# Altium PCB Main.PcbDoc (part 1 of 2)
Units mil, origin at the board's own origin, x right, y up, seen from the top; angles counter-clockwise.
Board outline 5000 x 4200 mil, 4 copper layers (Top Layer, Gnd 1, Power, Gnd 2), stack 62.4 mil thick; 161 components, 127 nets, 645 pads, 533 vias.
Unrouted connection lines stored in the file: 1.
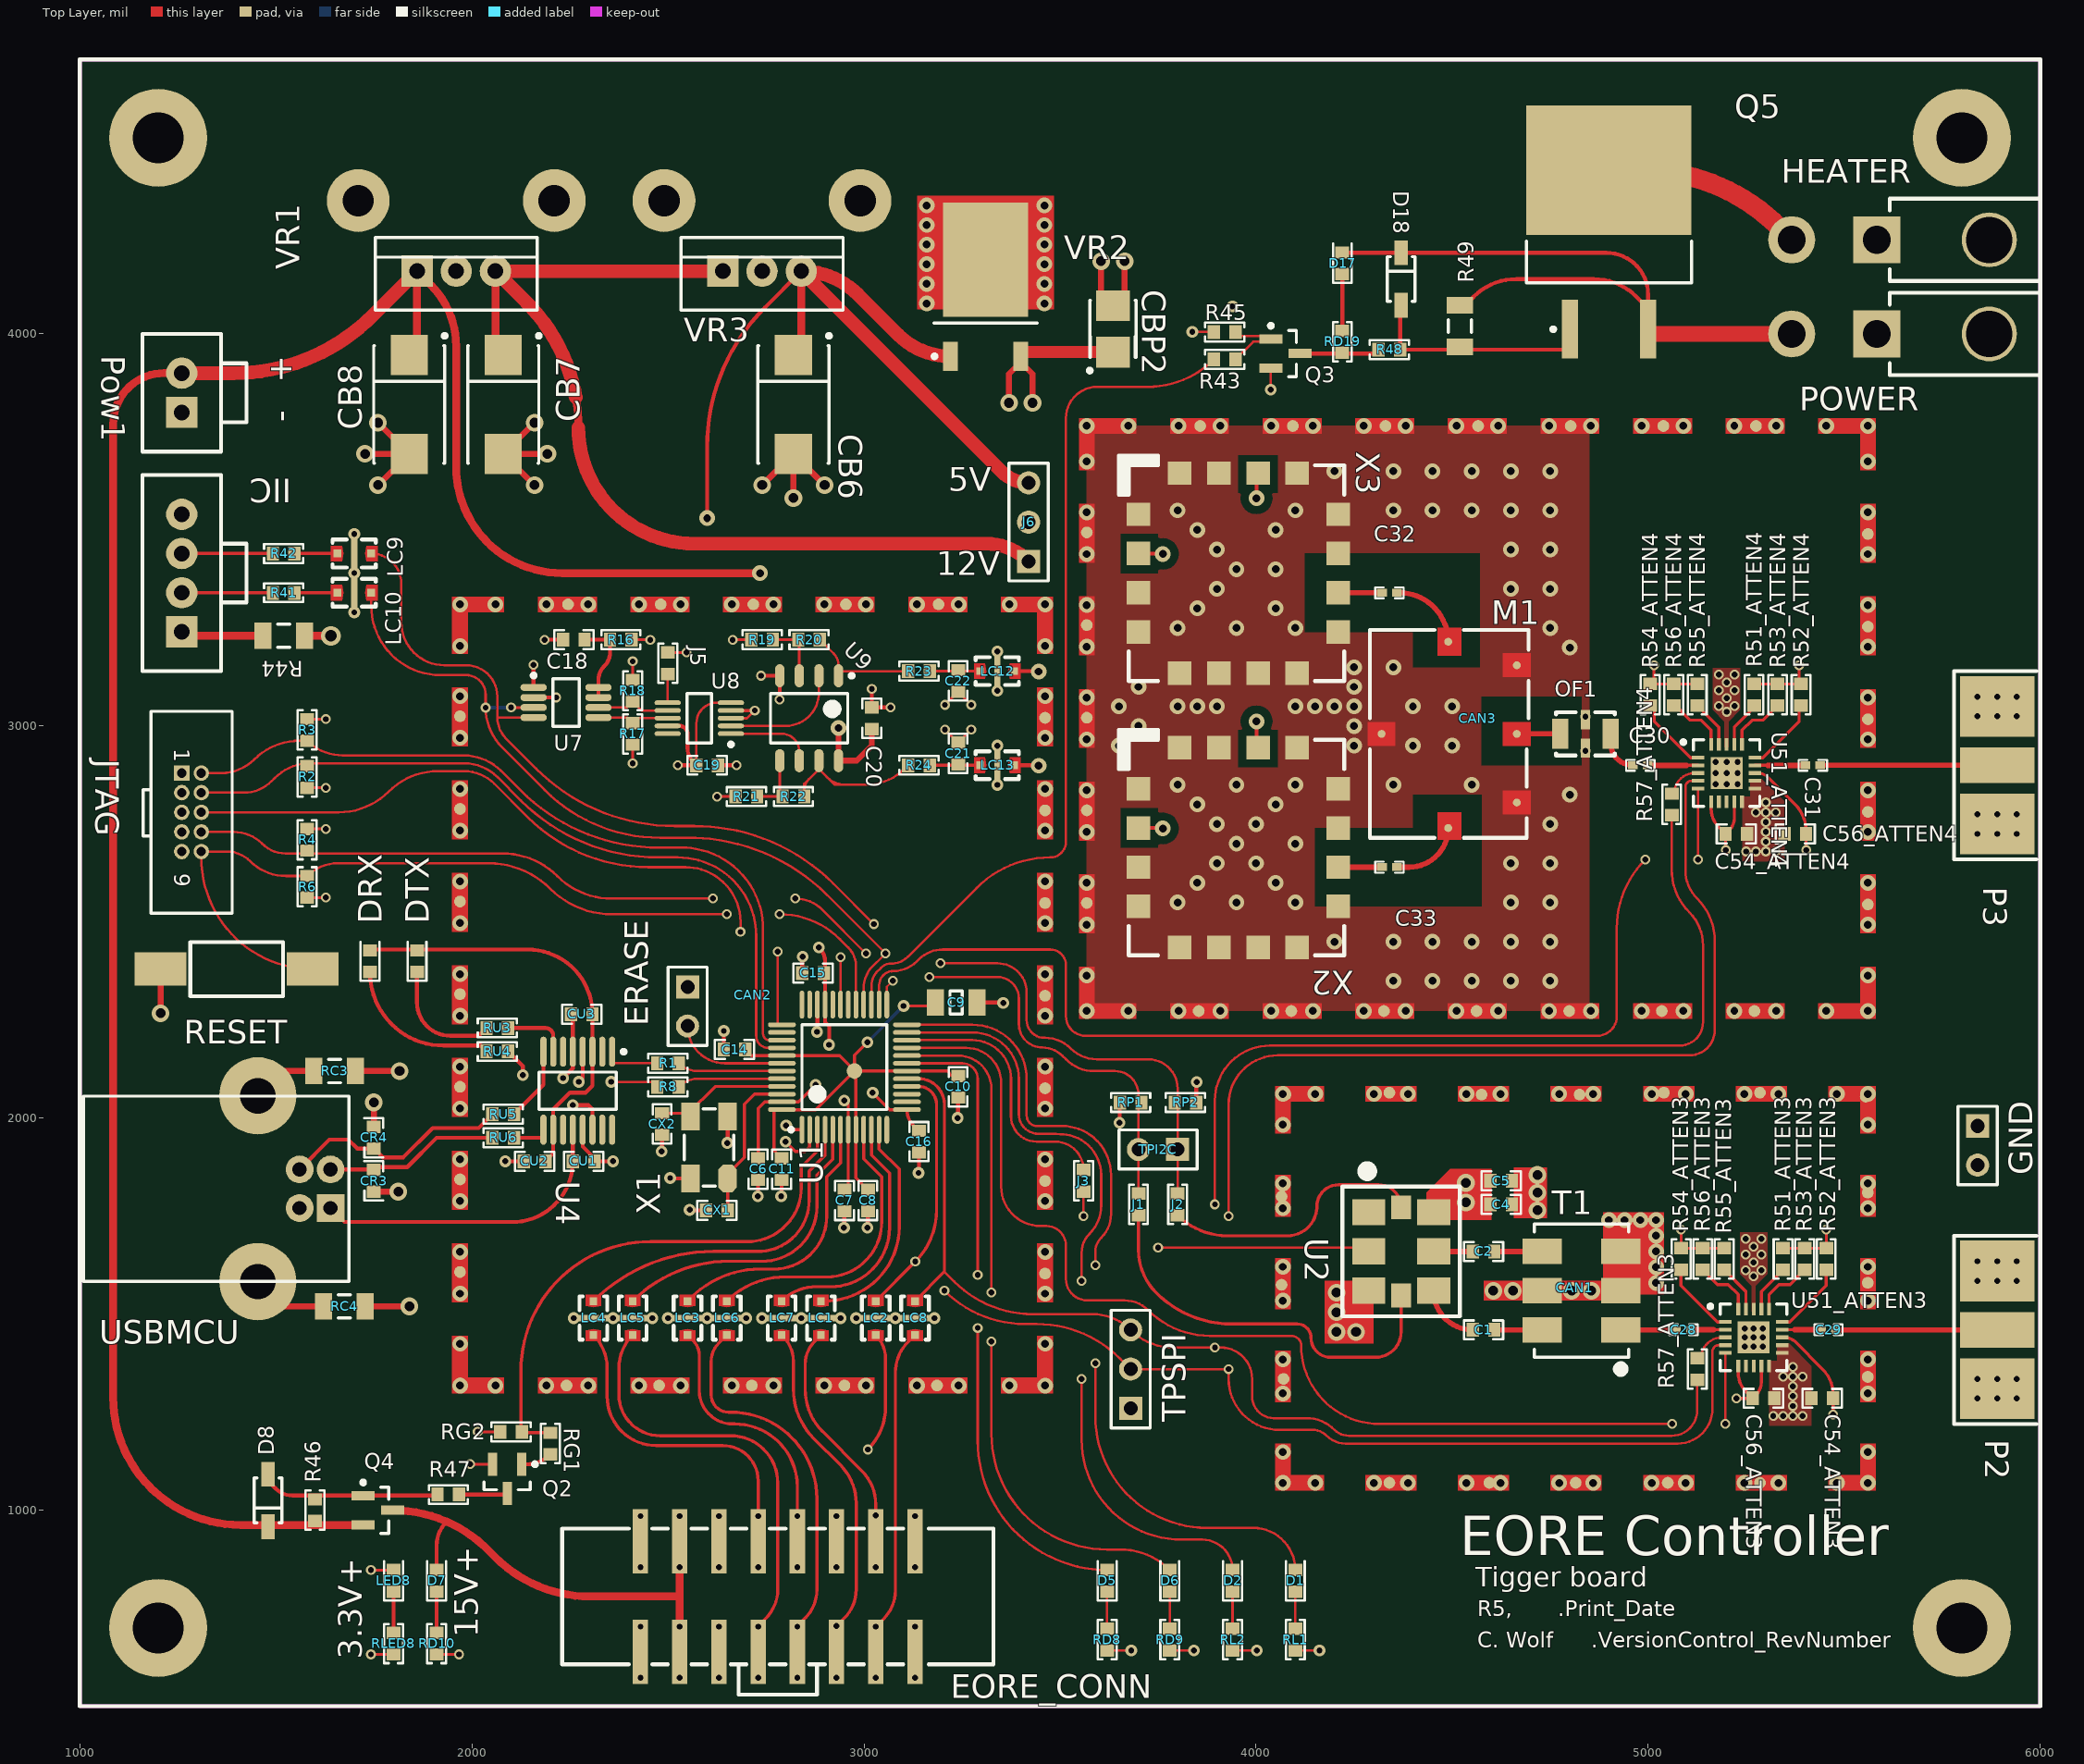
[diagram p0: Top Layer view]
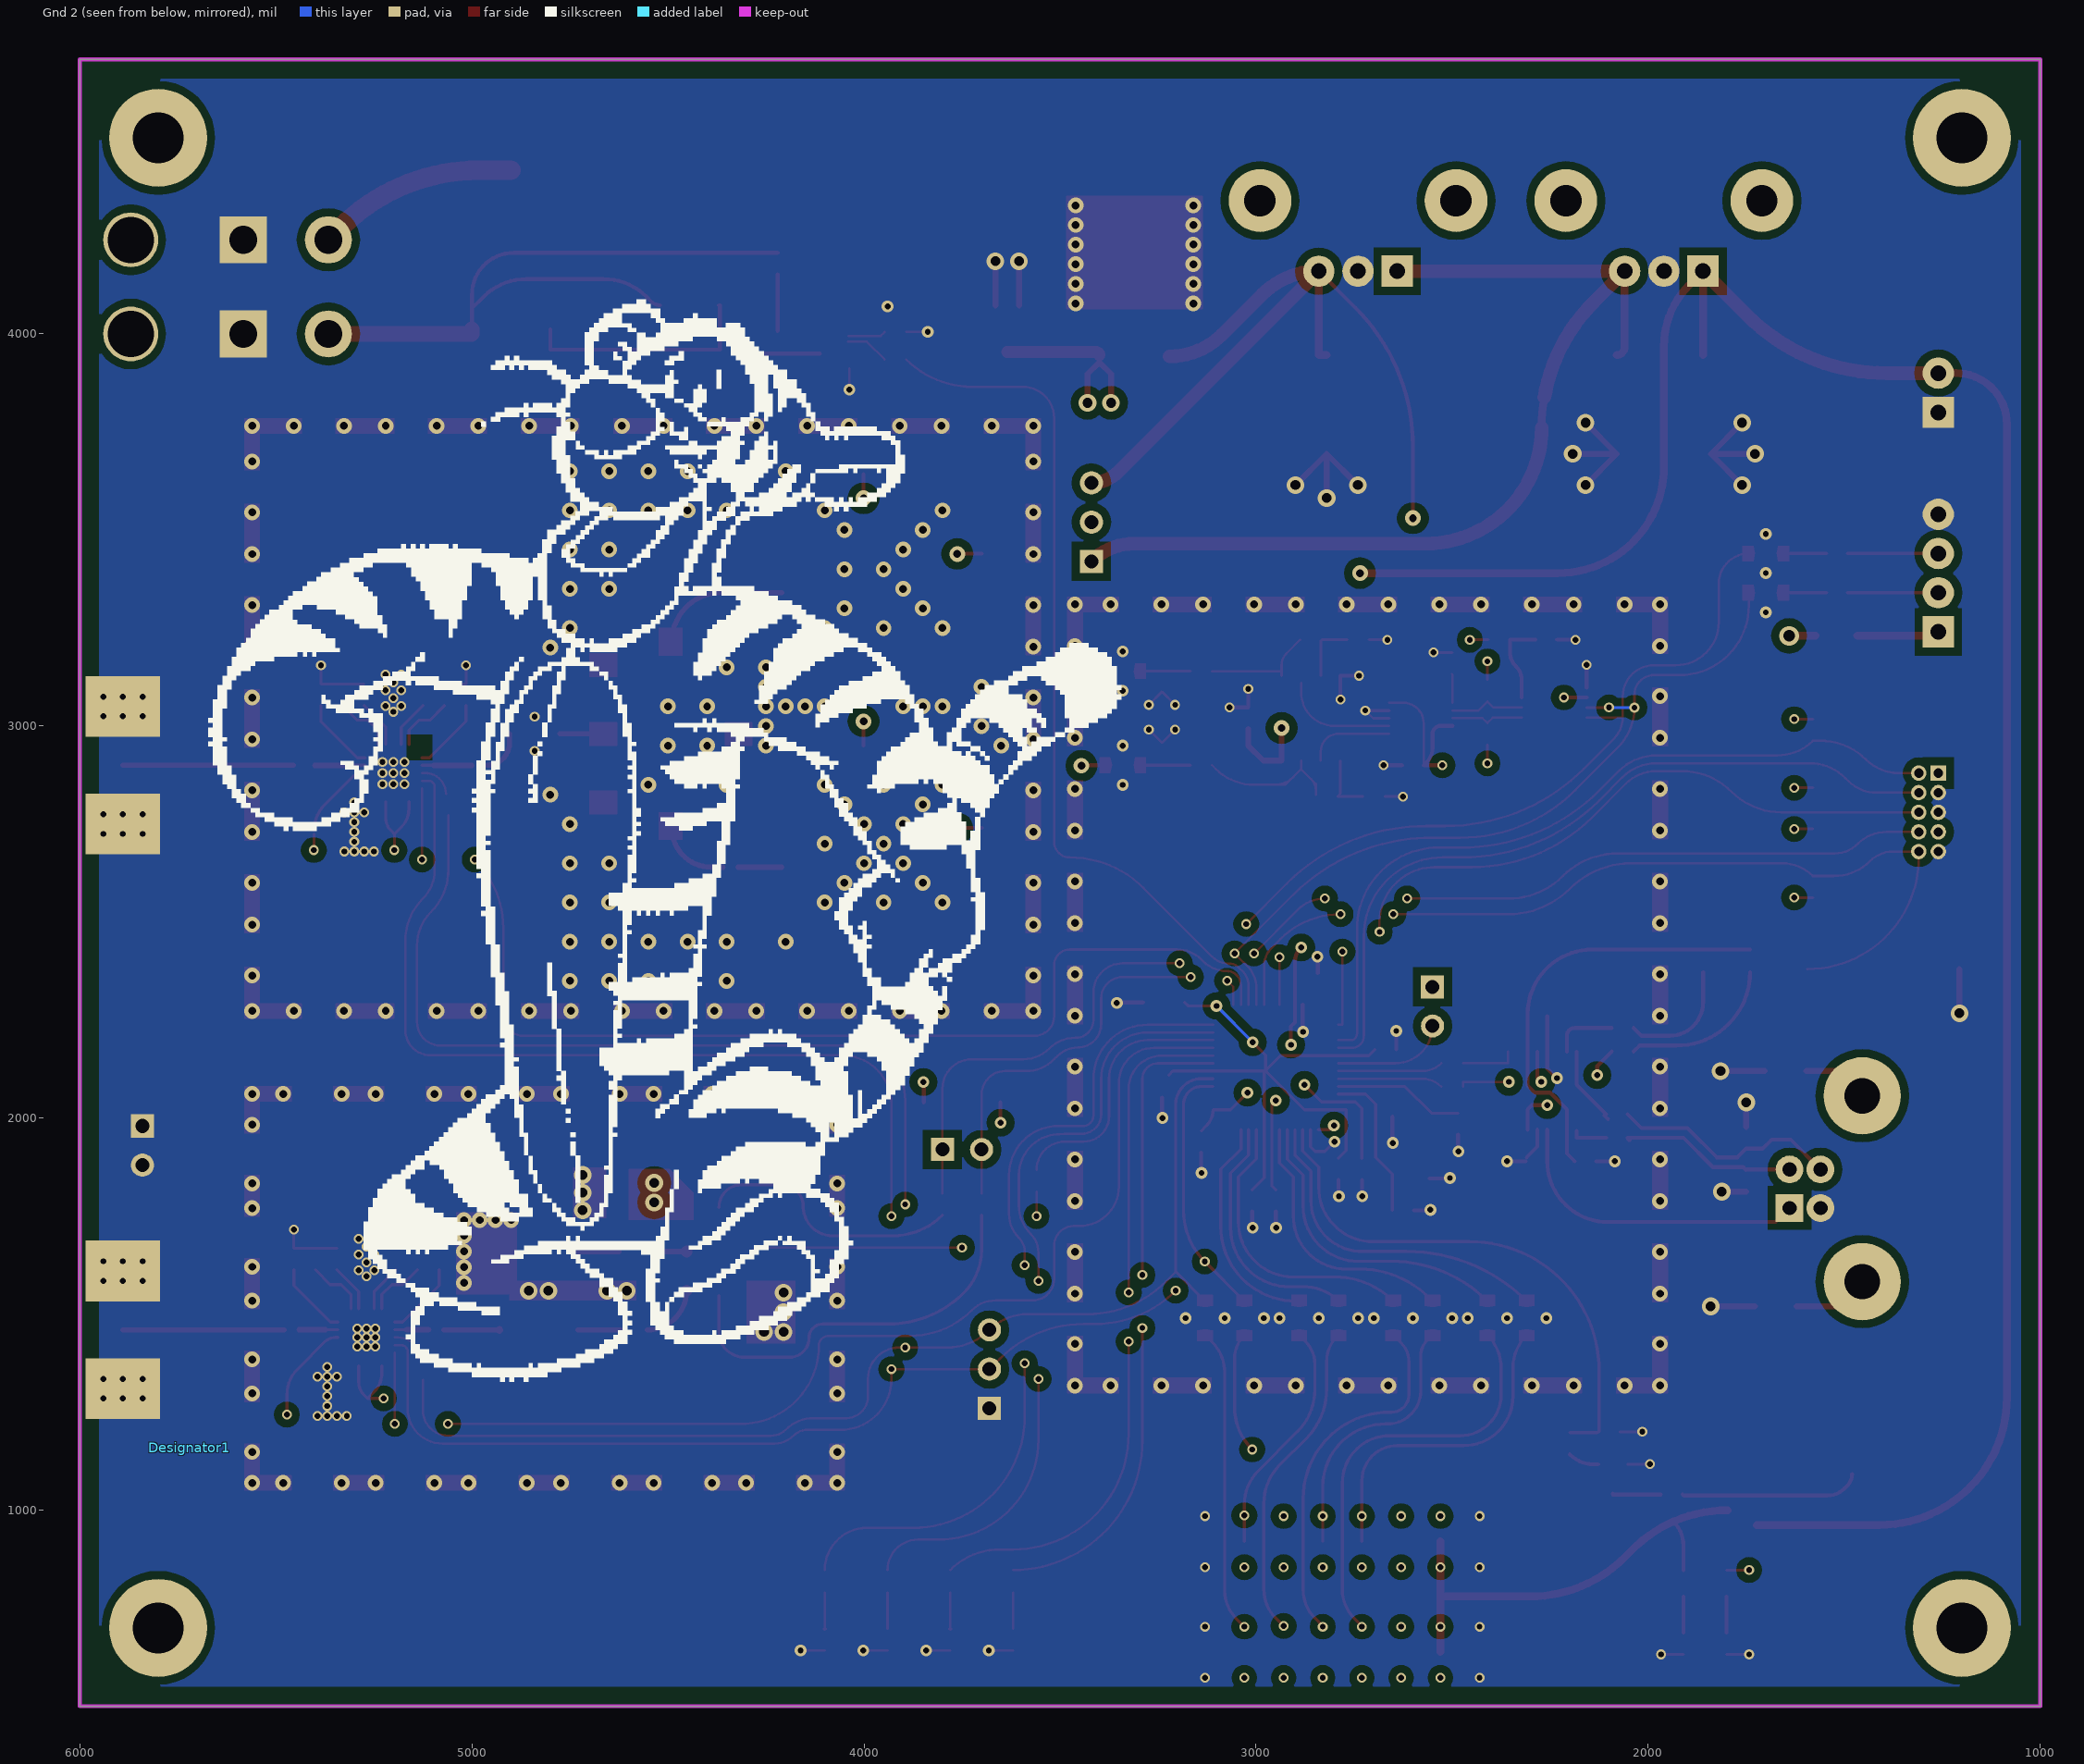
[diagram p1: Gnd 2 view, seen from below]
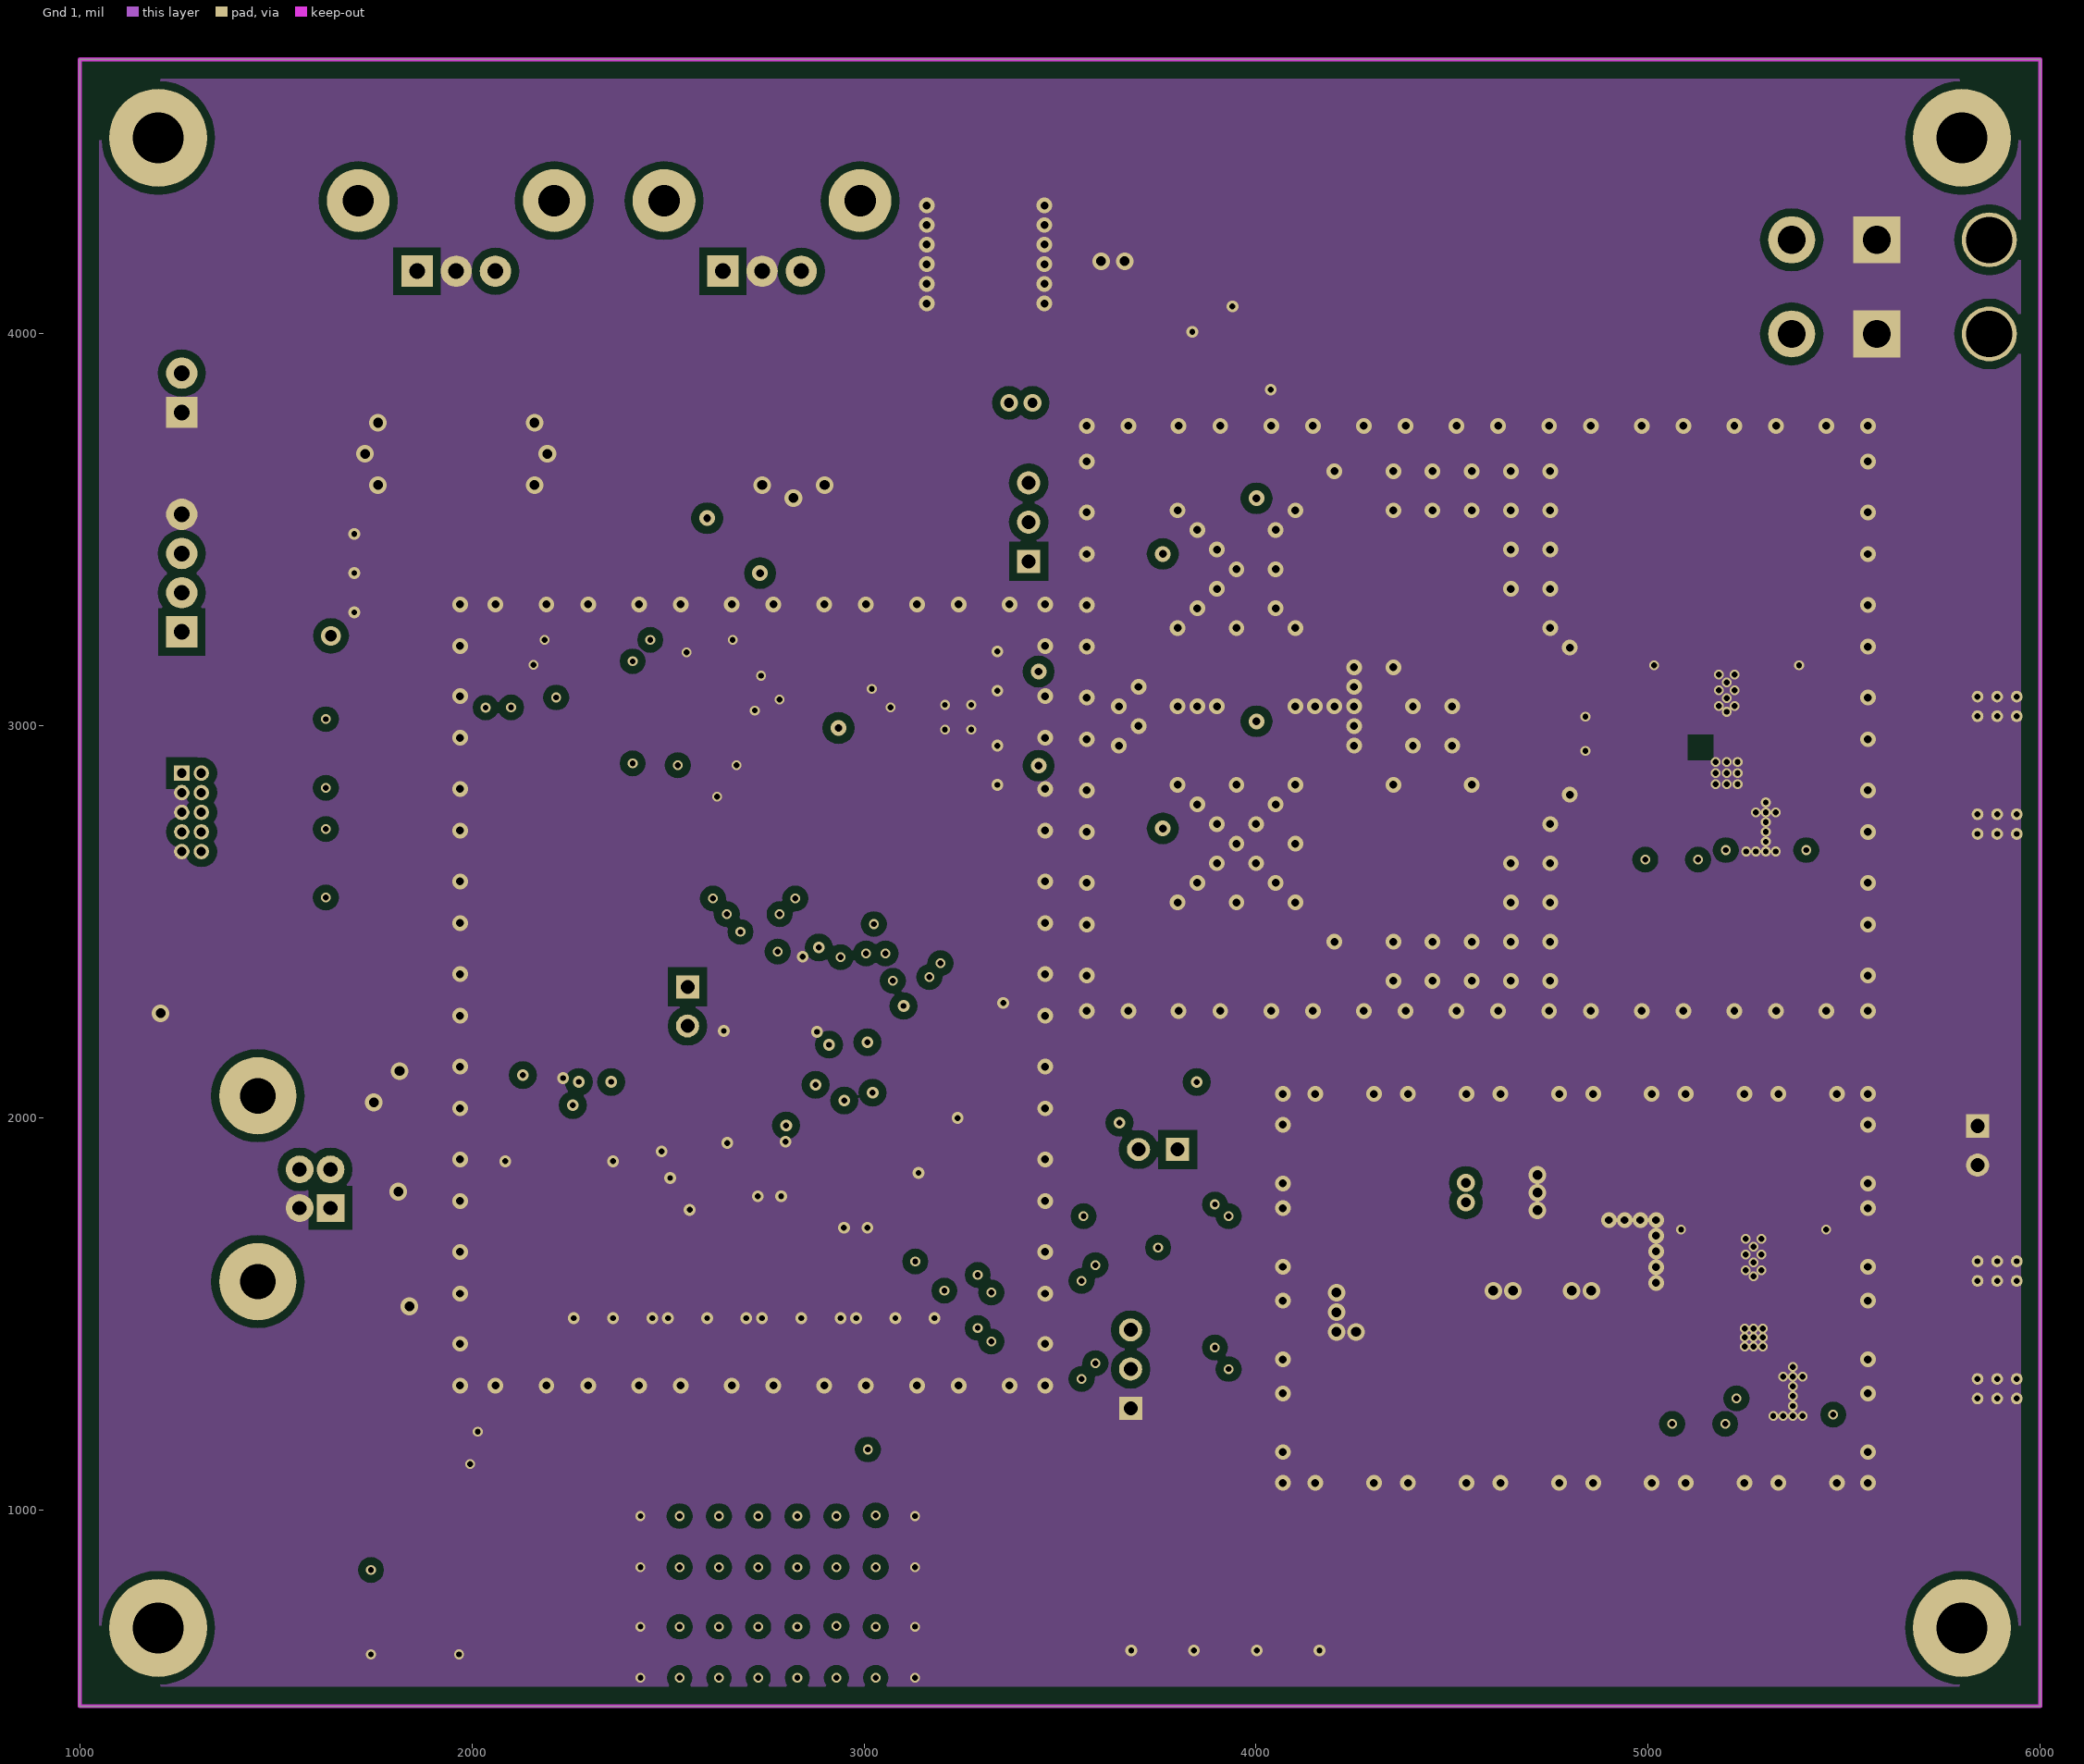
[diagram p2: Gnd 1]
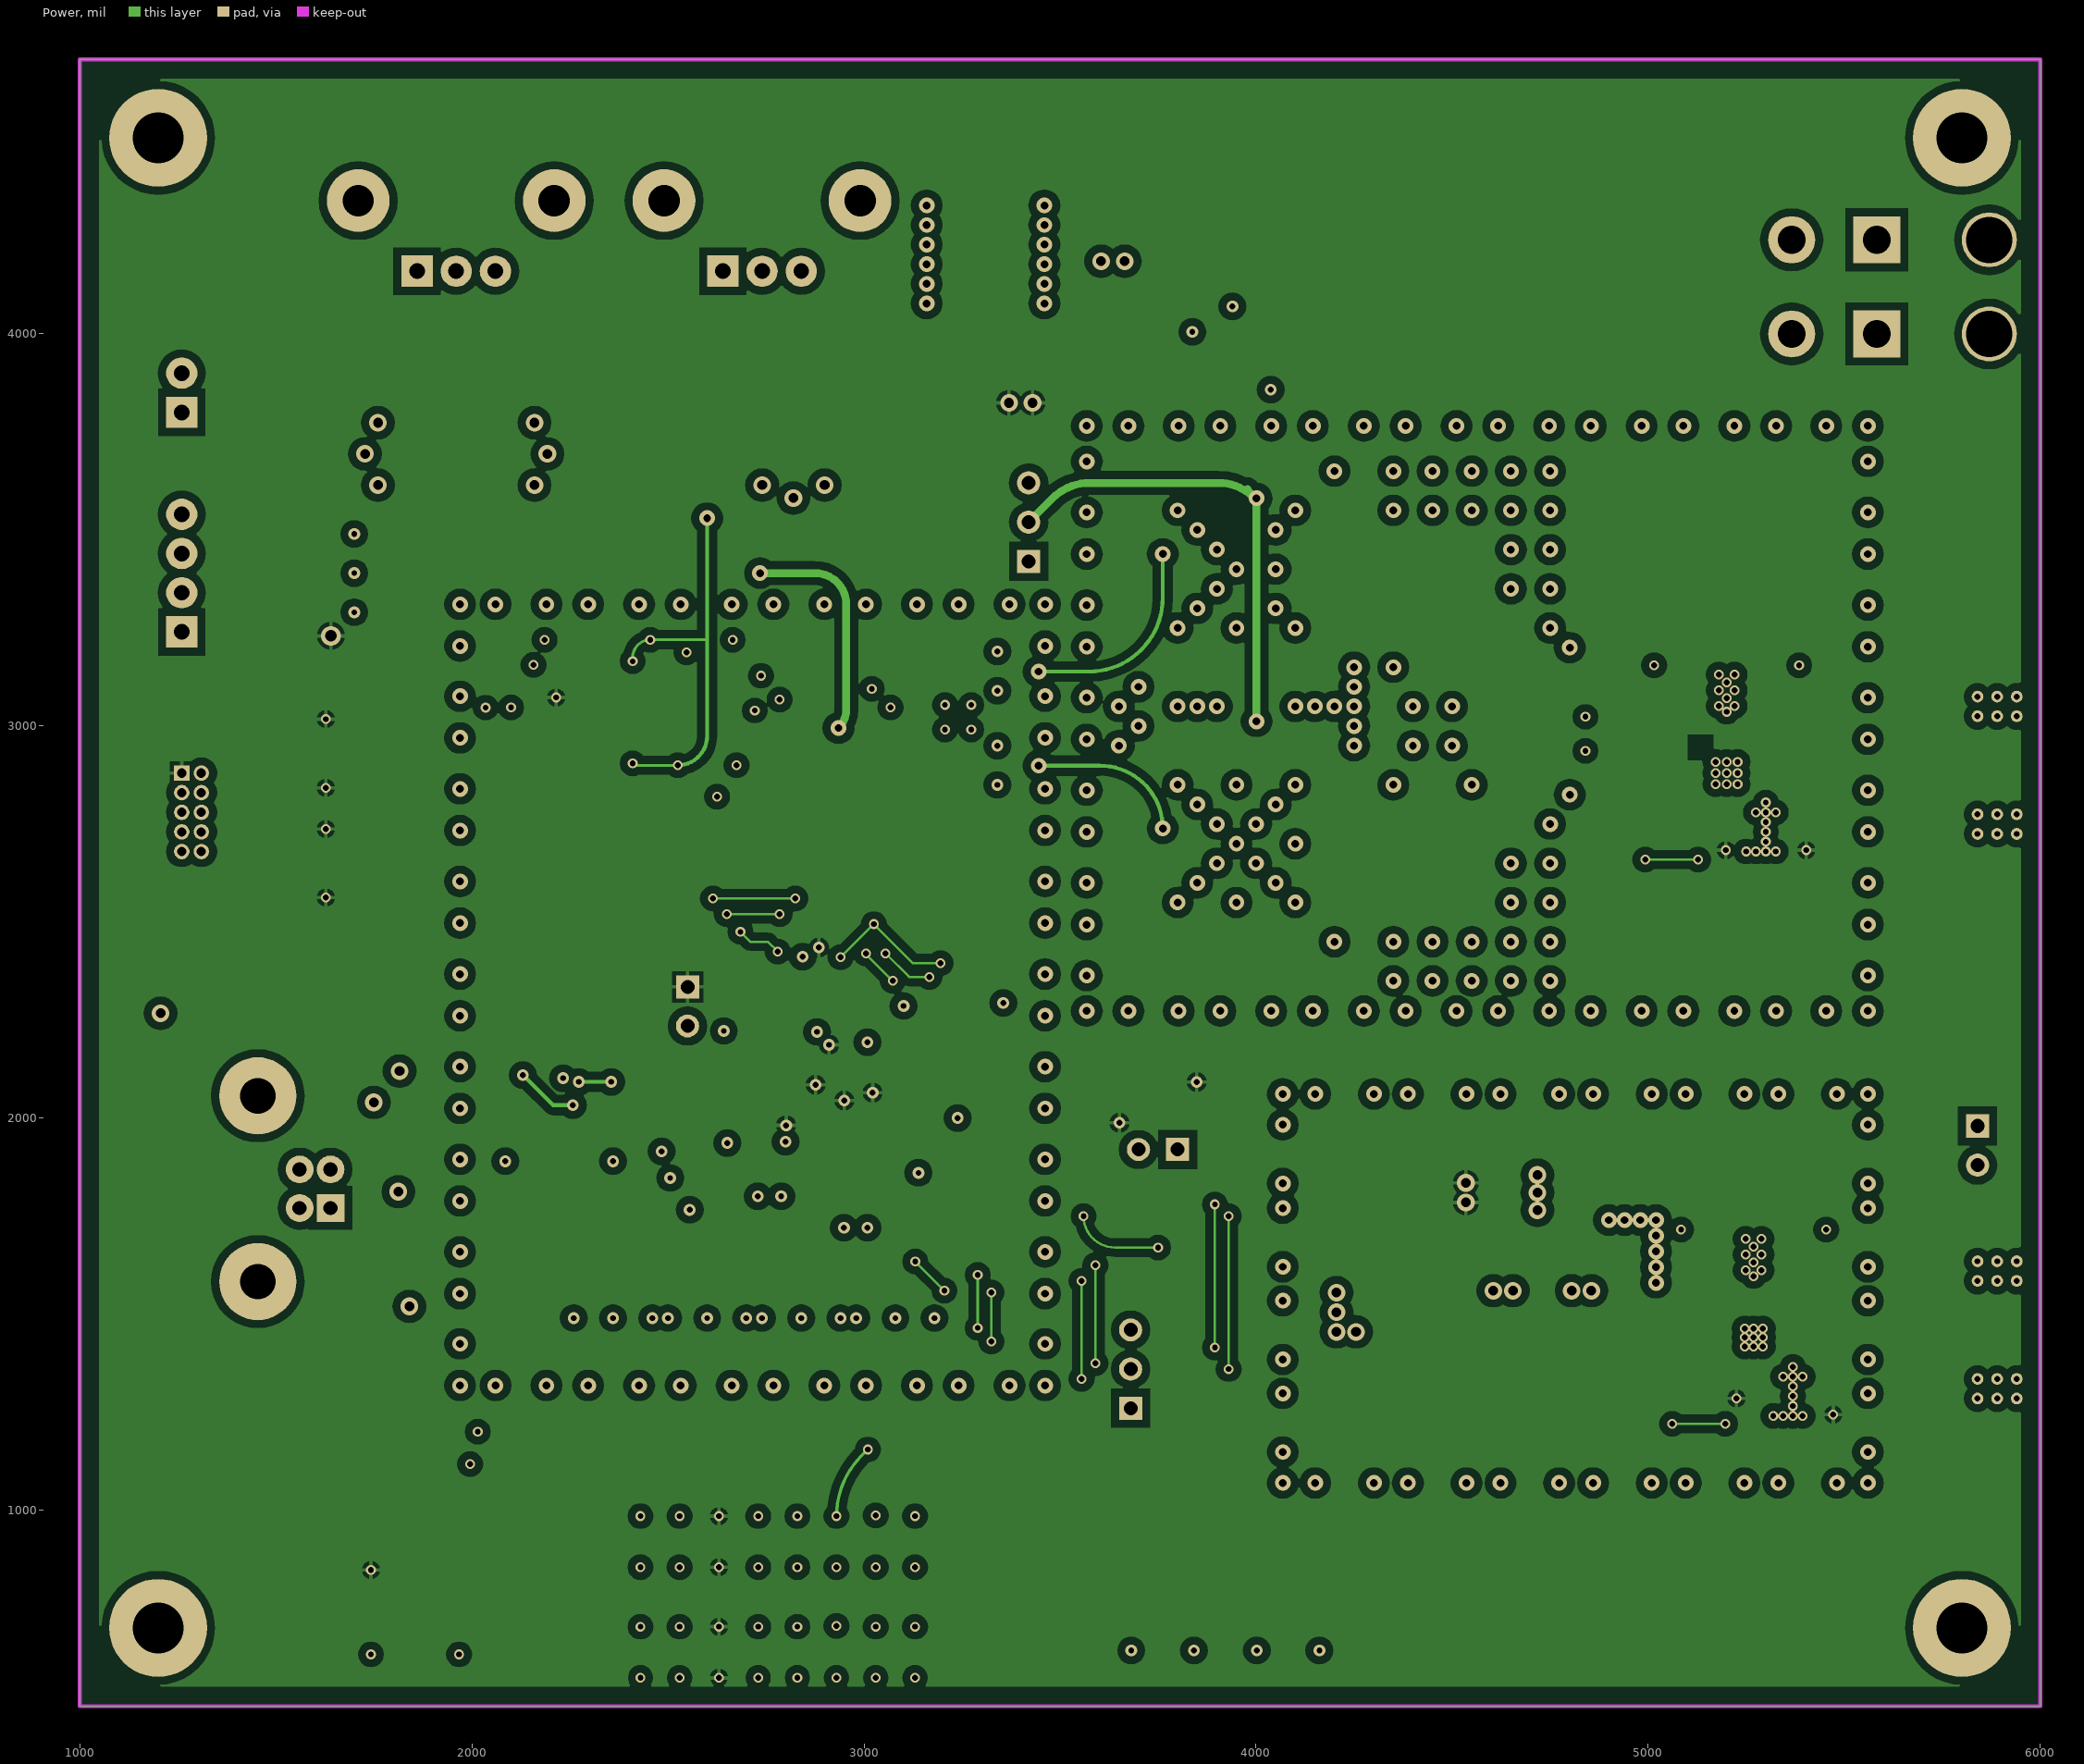
[diagram p3: Power]

## Layer stack, top to bottom
Top Layer: signal copper 1.4
Dielectric: prepreg 8.4, FR-4, Dk 4.8
Gnd 1: signal copper 1.4
Dielectric: core 40, FR-4, Dk 4.8
Power: signal copper 1.4
Dielectric: prepreg 8.4, FR-4, Dk 4.8
Gnd 2: signal copper 1.4

## Board outline
1000,500 1000,4700 6000,4700 6000,500

## Design rules (kind name [scope] priority, off if disabled: settings)
Clearance "Clearance Top Polygon" [InPolygon vs OnLayer('TopLayer')] p1: gap=15
Clearance "Clearance Polygon inner layers and bottom" [InPolygon vs NOT OnLayer('Top Layer')] p2: gap=20
Clearance [All] p3: gap=7
DiffPairsRouting [All] p1: maxlimit=10 minlimit=10 mostfreqgap=10 maxuncoupledlength=500
FlightTimeFalling [All] p1: maximum=1.000n
FlightTimeRising [All] p1: maximum=1.000n
HoleSize [All] p1: absolutevalues=TRUE maxlimit=500 minlimit=1 maxpercent=80.000 minpercent=20.000
HoleSize Testpoint [All] p2: absolutevalues=TRUE maxlimit=100 minlimit=1 maxpercent=80.000 minpercent=20.000
HoleSize TestPointUsage [All] p3: absolutevalues=TRUE maxlimit=100 minlimit=1 maxpercent=80.000 minpercent=20.000
MinimumAnnularRing [All] p1: minimumring=5
MinimumSolderMaskSliver [All] p1 off: minsoldermaskwidth=10
MinimumSolderMaskSliver SilkscreenOverComponentPads [All] p2: minsoldermaskwidth=10
OvershootFalling [All] p1: maximum=330.0m
OvershootRising [All] p1: maximum=330.0m
ParallelSegment [All] p1 off: limit=10000 gap=10
PolygonConnect Heatsink [InNet('GND') vs InNet('GND')] p1: connectstyle=Direct reliefconductorwidth=10 reliefentries=4 polygonreliefangle="90 Angle" airgapwidth=10
PolygonConnect [All] p2: connectstyle=Relief reliefconductorwidth=10 reliefentries=4 polygonreliefangle="90 Angle" airgapwidth=10
RoomDefinition EORE [InComponentClass('EORE')] p1 off: confinementstyle=ConfineIn formatcopy=TRUE lockcomponents=FALSE outline 7480,6715 7845,6715 7845,6465 7480,6465
RoomDefinition SWEEP [InComponentClass('SWEEP')] p2 off: confinementstyle=ConfineIn formatcopy=TRUE lockcomponents=FALSE outline 9301.73,3025 16046.73,3025 16046.73,3735 9301.73,3735
RoomDefinition ATTEN4 [InComponentClass('ATTEN4')] p3 off: confinementstyle=ConfineIn formatcopy=TRUE lockcomponents=FALSE outline 7900,2517.56 14345,2517.56 14345,2867.56 7900,2867.56
RoomDefinition TONE [InComponentClass('TONE')] p4 off: confinementstyle=ConfineIn formatcopy=TRUE lockcomponents=FALSE outline 7175,6445 7725,6445 7725,6900 7175,6900
RoomDefinition TEMP [InComponentClass('TEMP')] p5 off: confinementstyle=ConfineIn formatcopy=TRUE lockcomponents=FALSE outline 7020,6300 8490,6300 8490,6920 7020,6920
RoomDefinition ATTEN3 [InComponentClass('ATTEN3')] p6 off: confinementstyle=ConfineIn formatcopy=TRUE lockcomponents=FALSE outline 7110,6375 8090,6375 8090,6705 7110,6705
RoomDefinition USB [InComponentClass('USB')] p7 off: confinementstyle=ConfineIn formatcopy=TRUE lockcomponents=FALSE outline 7025,6310 8055,6310 8055,6835 7025,6835
RoomDefinition Main [InComponentClass('Main')] p8 off: confinementstyle=ConfineIn formatcopy=TRUE lockcomponents=FALSE outline 7020,6260 8445,6260 8445,6965 7020,6965
RoutingVias [All] p1: holewidth=15 width=30 viastyle="Through Hole" minholewidth=15 minwidth=25 maxholewidth=250 maxwidth=500
SignalStimulus [All] p1: kind=2 level=0 starttime=10.00n stoptime=60.00n periodtime=100.00n
SilkToSilkClearance [All] p1 off: silktosilkclearance=10
SolderMaskExpansion [All] p1: expansion=4
SupplyNets [All] p1: voltage=3.300
UndershootFalling [All] p1: maximum=330.0m
UndershootRising [All] p1: maximum=330.0m
Width Width_General [All] p1: maxlimit=250 minlimit=6 preferedwidth=10
Width "Width Differential Pair" [(InDifferentialPairClass('All Differential Pairs'))] p2: maxlimit=31.8 minlimit=1.94 preferedwidth=5.4 toplayer_minwidth=15.8 toplayer_prefwidth=22.52 midlayer1_minwidth=3.62 midlayer1_maxwidth=7.77 midlayer2_minwidth=0 midlayer2_maxwidth=0 midlayer2_prefwidth=0 bottomlayer_maxwidth=5.3 bottomlayer_prefwidth=3.35 impedancedriven=TRUE minimp=80.000000 maximp=100.000000 favimp=90.000000
24 further rules are at their usual default settings.

## Classes and differential pairs
channel class Attenuator: ATTEN3 ATTEN4
component class ATTEN4: C54_ATTEN4 C56_ATTEN4 R51_ATTEN4 R52_ATTEN4 R53_ATTEN4 R54_ATTEN4 R55_ATTEN4 R56_ATTEN4 R57_ATTEN4 U51_ATTEN4
component class SWEEP: C18 C19 C20 C21 C22 C30 C31 C32 C33 J5 J6 LC12 LC13 M1 OF1 R16 R17 R18 R19 R20 R21 R22 R23 R24 U7 U8 U9 X2 X3
component class EORE: D7 D8 EORE_CONN LC1 LC2 LC3 LC4 LC5 LC6 LC7 LC8 Q2 Q4 R46 R47 RD10 RG1 RG2
component class ATTEN3: C54_ATTEN3 C56_ATTEN3 R51_ATTEN3 R52_ATTEN3 R53_ATTEN3 R54_ATTEN3 R55_ATTEN3 R56_ATTEN3 R57_ATTEN3 U51_ATTEN3
component class USB: C6 C7 C8 C9 C10 C11 C14 C15 C16 CR3 CR4 CU1 CU2 CU3 CX1 CX2 D1 D2 D5 D6 DRX DTX ERASE JTAG R1 R2 R3 R4 R6 R8 RC3 RC4 RD8 RD9 RESET RL1 RL2 RU3 RU4 RU5 RU6 TPI2C TPSPI U1 U4 USBMCU X1
component class Main: CAN1 CAN2 CAN3 CB6 CB7 CB8 CBP2 LED8 P2 P3 Pow1 RLED8 RP1 RP2 VR1 VR2 VR3
component class TEMP: D17 D18 HEATER IIC LC9 LC10 POWER Q3 Q5 R41 R42 R43 R44 R45 R48 R49 RD19
component class TONE: C1 C2 C4 C5 C28 C29 GND J1 J2 J3 T1 U2
differential pair USB: +USB_P -USB_N

## Components (designator, comment, footprint, x,y, rotation, side; value= is the part's Value field where it differs from the comment)
C1 "SMT Cap" 0603C 4580,1460 r0 top
C2 "SMT Cap" 0603C 4580,1660 r0 top
C4 "SMT Cap" 0603C 4625,1780 r180 top
C5 "SMT Cap" 0603C 4625,1840 r180 top
C6 "Cap Semi" 0603C 2730,1870 r90 top
C7 "Cap Semi" 0603C 2950,1790 r90 top
C8 "Cap Semi" 0603C 3010,1790 r90 top
C9 "Cap Semi" 1206C 3235,2295 r180 top
C10 "Cap Semi" 0603C 3240,2080 r90 top
C11 "Cap Semi" 0603C 2790,1870 r90 top
C14 "Cap Semi" 0603C 2670,2175 r0 top
C15 "Cap Semi" 0603C 2870,2370 r0 top
C16 "Cap Semi" 0603C 3140,1940 r90 top
C18 "Cap Semi" 0603C 2260,3220 r0 top
C19 "Cap Semi" 0603C 2600,2900 r180 top
C20 "Cap Semi" 0603C 3020,3020 r270 top
C21 "Cap Semi" 0603C 3240,2930 r270 top
C22 "Cap Semi" 0603C 3240,3115 r90 top
C28 "Cap" 0402C 5090,1460 r0 top
C29 "Cap" 0402C 5460,1460 r0 top
C30 "Cap" 0402C 4980,2900 r0 top
C31 "Cap" 0402C 5420,2900 r0 top
C32 "Cap" 0402C 4340,3340 r0 top
C33 "Cap" 0402C 4340,2640 r0 top
C54_ATTEN3 "SMT Cap" 0603C 5444.02,1285.44 r0 top (schematic designator C54)
C54_ATTEN4 "SMT Cap" 0603C 5225,2725 r180 top (schematic designator C54)
C56_ATTEN3 "SMT Cap" 0603C 5294.02,1285.44 r180 top (schematic designator C56)
C56_ATTEN4 "SMT Cap" 0603C 5375,2725 r0 top (schematic designator C56)
CAN1 "EMI Shield" BMI-S-205-F 5580,1050 r90 top
CAN2 "EMI Shield" BMI-S-230-F 1950,3330 r270 top locked
CAN3 "EMI Shield" BMI-S-230-F 5580,3785 r180 top locked
CB6 "Cap Pol3" V 2820,3820 r270 top
CB7 "Cap Pol3" V 2080,3820 r270 top
CB8 "Cap Pol3" V 1840,3820 r270 top
CBP2 "100 uF" B 3634.76,4012.83 r90 top
CR3 "PGB1010603" 0603PG 1750,1840 r270 top
CR4 "PGB1010603" 0603PG 1750,1950 r90 top
CU1 "Cap Semi" 0603C 2285,1890 r180 top
CU2 "Cap Semi" 0603C 2160,1890 r0 top
CU3 "Cap Semi" 0603C 2280,2265 r0 top
CX1 "Cap Semi" 0603C 2625,1765 r0 top
CX2 "Cap Semi" 0603C 2485,1985 r90 top
D1 "LED0" "0603 SMT LED" 4100,820 r90 top
D2 "LED0" "0603 SMT LED" 3940,820 r90 top
D5 "LED0" "0603 SMT LED" 3620,820 r90 top
D6 "LED0" "0603 SMT LED" 3780,820 r90 top
D7 "LED0" "0603 SMT LED" 1910,820 r90 top
D8 "D Zener" SOD123/X.85 1480,1025 r90 top
D17 "LED0" "0603 SMT LED" 4220,4180 r90 top
D18 "D Zener" SOD123/X.85 4370,4140 r270 top
Designator1 "Comment" ? 5720,1160 r180 bottom
DRX "LED0" "0603 SMT LED" 1740,2400 r90 top
DTX "LED0" "0603 SMT LED" 1860,2400 r90 top
EORE_CONN "Header 8X2" "SMT 16-pin rectangular header" 2780,780 r0 top
ERASE "Header 2" HDR1X2 2550,2335 r270 top
GND "Jumper" HDR1X2 5840,1980 r270 top
HEATER "Header 2" "Molex Mini-Fit Jr 5569 - 2 Pin, RA" 5870,4240 r90 top
IIC "Header 4" "AMPModu MTE 4 Pin Shrouded Header" 1260,3540 r270 top
J1 "Jumper" 0603R 3700,1780 r90 top
J2 "Jumper" 0603R 3800,1780 r90 top
J3 "Jumper" 0603R 3560,1840 r90 top
J5 "" 0603R 2500,3160 r270 top
J6 "Jumper" HDR1X3 3420,3420 r90 top
JTAG "JTAG" "MHDR2X5 - Shrouded" 1260,2680 r270 top
LC1 "MEM2012F" "MEM2012S LC Filter" 2890,1490 r90 top
LC2 "MEM2012F" "MEM2012S LC Filter" 3030,1490 r90 top
LC3 "MEM2012F" "MEM2012S LC Filter" 2550,1490 r270 top
LC4 "MEM2012F" "MEM2012S LC Filter" 2310,1490 r270 top
LC5 "MEM2012F" "MEM2012S LC Filter" 2410,1490 r90 top
LC6 "MEM2012F" "MEM2012S LC Filter" 2650,1490 r90 top
LC7 "MEM2012F" "MEM2012S LC Filter" 2790,1490 r270 top
LC8 "MEM2012F" "MEM2012S LC Filter" 3130,1490 r270 top
LC9 "MEM2012F" "MEM2012S LC Filter" 1700,3440 r180 top
LC10 "MEM2012F" "MEM2012S LC Filter" 1700,3340 r0 top
LC12 "MEM2012F" "MEM2012S LC Filter" 3340,3140 r0 top
LC13 "MEM2012F" "MEM2012S LC Filter" 3340,2900 r0 top
LED8 "LED0" "0603 SMT LED" 1800,820 r90 top
M1 "HJK-272MH+" TTT881 4320,2980 r90 top
OF1 "LFCN-xxx" FV1206 4840,2980 r0 top
P2 "COAX-M" "SMA Jack - PCB Edge - MultiSize" 5990,1460 r180 top
P3 "COAX-M" "SMA Jack - PCB Edge - MultiSize" 5990,2900 r180 top
Pow1 "Header 2" "AMPModu MTE 2 Pin Shrouded Header" 1260,3900 r270 top
POWER "Header 2" "Molex Mini-Fit Jr 5569 - 2 Pin, RA" 5870,4000 r90 top
Q2 "MOSFET-N" SOT23-3N 2090,1080 r270 top
Q3 "MOSFET-N" SOT23-3N 4075,3950 r0 top
Q4 "SI2319CDS-T1-GE3CT-ND" SOT23-3N 1760,1000 r0 top
Q5 "IRF4905STRLPBFCT-ND" TO254P1520-3_4N 4900,4260 r90 top
R1 "Res Semi" 0603R 2500,2140 r0 top
R2 "Res Semi" 0603R 1580,2870 r270 top
R3 "Res Semi" 0603R 1580,2990 r90 top
R4 "Res Semi" 0603R 1580,2710 r90 top
R6 "Res Semi" 0603R 1580,2590 r270 top
R8 "Res Semi" 0603R 2500,2080 r0 top
R16 "Res Semi" 0603R 2380,3220 r0 top
R17 "Res Semi" 0603R 2410,2980 r270 top
R18 "Res Semi" 0603R 2410,3090 r90 top
R19 "Res Semi" 0603R 2740,3220 r180 top
R20 "Res Semi" 0603R 2860,3220 r0 top
R21 "Res Semi" 0603R 2700,2820 r0 top
R22 "Res Semi" 0603R 2820,2820 r180 top
R23 "Res Semi" 0603R 3140,3140 r180 top
R24 "Res Semi" 0603R 3140,2900 r180 top
R41 "Res Semi" 0603R 1520,3340 r180 top
R42 "Res Semi" 0603R 1520,3440 r180 top
R43 "Res Semi" 0603R 3920,3935 r0 top
R44 "Res Semi" 1206R 1520,3230 r0 top
R45 "Res Semi" 0603R 3920,4005 r0 top
R46 "Res Semi" 0603R 1600,1000 r270 top
R47 "Res Semi Small" 0603R 1940,1040 r0 top
R48 "Res Semi Small" 0603R 4340,3960 r180 top
R49 "Res Semi" 1206R 4520,4020 r90 top
R51_ATTEN3 "RES Semi" 0603R 5344,1640.77 r90 top (schematic designator R51)
R51_ATTEN4 "RES Semi" 0603R 5270,3080 r90 top (schematic designator R51)
R52_ATTEN3 "RES Semi" 0603R 5454,1640.77 r90 top (schematic designator R52)
R52_ATTEN4 "RES Semi" 0603R 5390,3080 r90 top (schematic designator R52)
R53_ATTEN3 "RES Semi" 0603R 5399,1640.77 r90 top (schematic designator R53)
R53_ATTEN4 "RES Semi" 0603R 5330,3080 r90 top (schematic designator R53)
R54_ATTEN3 "RES Semi" 0603R 5084,1640.77 r90 top (schematic designator R54)
R54_ATTEN4 "RES Semi" 0603R 5005,3080 r90 top (schematic designator R54)
R55_ATTEN3 "RES Semi" 0603R 5194,1640.77 r90 top (schematic designator R55)
R55_ATTEN4 "RES Semi" 0603R 5125,3080 r90 top (schematic designator R55)
R56_ATTEN3 "RES Semi" 0603R 5139,1640.77 r90 top (schematic designator R56)
R56_ATTEN4 "RES Semi" 0603R 5065,3080 r90 top (schematic designator R56)
R57_ATTEN3 "RES Semi" 0603R 5125,1360 r270 top (schematic designator R57)
R57_ATTEN4 "RES Semi" 0603R 5060,2800 r270 top (schematic designator R57)
RC3 "Res Semi" 1206R 1650,2120 r180 top
RC4 "Res Semi" 1206R 1675,1520 r180 top
RD8 "Res Semi Small" 0603R 3620,670 r270 top
RD9 "Res Semi Small" 0603R 3780,670 r270 top
RD10 "Res Semi Small" 0603R 1910,660 r270 top
RD19 "Res Semi Small" 0603R 4220,3980 r270 top
RESET "SW-PB" TL3302BF180QG/TR 1400,2380 r180 top
RG1 "Res Semi Small" 0603R 2200,1170 r270 top
RG2 "Res Semi Small" 0603R 2100,1200 r0 top
RL1 "Res Semi Small" 0603R 4100,670 r270 top
RL2 "Res Semi Small" 0603R 3940,670 r270 top
RLED8 "Res Semi Small" 0603R 1800,660 r270 top
RP1 "Res Semi" 0603R 3680,2040 r180 top
RP2 "Res Semi" 0603R 3820,2040 r0 top
RU3 "Res Semi Small" 0603R 2065,2230 r0 top
RU4 "Res Semi Small" 0603R 2065,2170 r0 top
RU5 "Res Semi Small" 0603R 2080,2010 r0 top
RU6 "Res Semi Small" 0603R 2080,1950 r0 top
T1 "ADT4-1WT" CD542 4830,1560 r90 top
TPI2C "Header 2" HDR1X2 3800,1920 r180 top
TPSPI "Header 3" HDR1X3 3680,1260 r90 top
U1 "ATSAM4N8A" TSQFP50P900X900-48N 2950,2130 r90 top
U2 "SI57x" SI57x 4370,1660 r270 top
U4 "FT230X" SOP635P600-16AN 2270,2070 r270 top
U7 "PCA9306" TSOP65P490-8AN 2240,3060 r0 top
U8 "AD56x7R" TSSOP50P490-10AN 2580,3020 r180 top
U9 "LM7332" SOIC127P600-8CN 2860,3020 r270 top
U51_ATTEN3 "DAT-31R5-SP" QFN50P400X400X90_HS-21N#1 5269,1440.77 r0 top (schematic designator U51)
U51_ATTEN4 "DAT-31R5-SP" QFN50P400X400X90_HS-21N#2 5200,2880 r0 top (schematic designator U51)
USBMCU "USB B Connector" "USB Connector (type B)" 1600,1820 r270 top
VR1 "7812" "TO-220 - Small Heatsink" 1960,4160 r0 top
VR2 "LF33CDT" TO228P1000-3_4N 3310,4120 r90 top
VR3 "7805" "TO-220 - Small Heatsink" 2740,4160 r0 top
X1 "CTX819CT-ND" "Abracon ABM3B Crystal" 2605,1925 r90 top
X2 "ROS-3200-419+" CK605 3700,2840 r270 top
X3 "ROS-3200-419+" CK605 3700,3540 r270 top

## Footprints (in the part's own frame and the unit in brackets; to place one, negate y for a bottom-side part, rotate by r counter-clockwise, add the part's x,y. Pads: shape width x height; smd on the part's side, far side on the other; paste and mask are expansions set on the pad)
0402C [mil]
  rect 25x20 smd: 1(-19.02,0) 2(19.02,0)
  silkscreen extent -36,-14 36,14, body extent -36,-14 36,14
"0603 SMT LED" [mm]
  rect 0.8x0.9 smd: 1(0.7,0) 2(-0.7,0)
  silkscreen extent -1.27,-0.61 1.27,0.61, body extent -0.87,-0.48 0.87,0.48, height 1.3
0603C [mm] "0603 Size Capacitor"
  rect 0.8x0.9 smd: 1(-0.7,0) 2(0.7,0)
  silkscreen extent -1.27,-0.61 1.27,0.61, body extent -0.87,-0.48 0.87,0.48, height 1.3
0603PG [mm]
  rect 0.8x0.9 smd: 1(-0.7,0) 2(0.7,0)
  silkscreen extent -1.27,-0.61 1.27,0.61, body extent -0.87,-0.48 0.87,0.48, height 1.3
0603R [mm]
  rect 0.8x0.9 smd: 1(-0.7,0) 2(0.7,0)
  silkscreen extent -1.27,-0.61 1.27,0.61, body extent -0.87,-0.48 0.87,0.48, height 1.3
1206C [mm] "1206 Chip Capacitor"
  rect 1.1x1.7 smd: 1(-1.35,0) 2(1.35,0)
  silkscreen extent -0.4,-0.75 0.4,0.75, body extent -1.7,-0.9 1.7,0.9, height 1.3
1206R [mm] "1206 Chip Resistor"
  rect 1.1x1.7 smd: 1(-1.35,0) 2(1.35,0)
  silkscreen extent -0.4,-0.75 0.4,0.75, body extent -1.7,-0.9 1.7,0.9, height 1.3
"Abracon ABM3B Crystal" [mm] "Abracon ABM3B Quartz Crystal"
  oct 1.8x1.2 smd: 1(-2,-1.2)
  rect 1.8x1.2 smd: 2(2,-1.2) 3(2,1.2) 4(-2,1.2)
  silkscreen extent -2.5,-1.6 2.5,1.6, body extent -2.5,-1.6 2.5,1.6, height 2.54
"AMPModu MTE 2 Pin Shrouded Header" [mil] "AMPModu MTE 2 Pin Shrouded Header"
  rect 80x80 hole 40: 1(100,0)
  round 80 hole 40: 2(0,0)
  silkscreen extent -100,-100 200,165, body extent -100,-102 200,162, height 540
"AMPModu MTE 4 Pin Shrouded Header" [mil] "AMPModu MTE 4 Pin Shrouded Header"
  rect 80x80 hole 40: 1(300,0)
  round 80 hole 40: 2(200,0) 3(100,0) 4(0,0)
  silkscreen extent -100,-100 400,165, body extent -100,-100 400,160, height 540
B [mm] "Capacitor, SM Tantalum; Body 3.5 x 2.8 mm (LxW typ)"
  rect 2x2.2 smd: 1(-1.5,0) 2(1.5,0)
  silkscreen extent -2.82,-1.5 1.85,1.62
BMI-S-205-F [mil] "Laird BMI-S-205-F EMI Shield"
  round 30 smd: 1(20,1240) 1(20,765) 1(20,530) 1(20,295) 1(20,1510) 1(20,985) 1(20,25) 1(285,1510) 1(290,20) 1(525,1515) 1(530,20) 1(750,1515) 1(760,20) 1(1005,25) 1(1010,1005) 1(1010,1505) 1(1010,755) 1(1015,1240) 1(1015,295) 1(1015,540)
  Top Layer region: 0,0 0,120.08 39.37,120.08 39.37,39.37 120.08,39.37 120.08,0
  Top Layer region: 0,226.38 0,356.3 39.37,356.3 39.37,226.38
  Top Layer region: 0,462.6 0,592.52 39.37,592.52 39.37,462.6
  Top Layer region: 0,698.82 0,828.74 39.37,828.74 39.37,698.82
  Top Layer region: 0,935.04 0,1064.96 39.37,1064.96 39.37,935.04
  Top Layer region: 0,1171.26 0,1301.18 39.37,1301.18 39.37,1171.26
  Top Layer region: 0,1407.48 39.37,1407.48 39.37,1492.13 120.08,1492.13 120.08,1531.5 0,1531.5
  Top Layer region: 226.38,1492.13 356.3,1492.13 356.3,1531.5 226.38,1531.5
  Top Layer region: 462.6,1492.13 592.52,1492.13 592.52,1531.5 462.6,1531.5
  Top Layer region: 698.82,1492.13 805.12,1492.13 805.12,1531.5 698.82,1531.5
  Top Layer region: 911.42,1492.13 911.42,1531.5 1031.5,1531.5 1031.5,1407.48 992.13,1407.48 992.13,1492.13
  Top Layer region: 992.13,1171.26 1031.5,1171.26 1031.5,1301.18 992.13,1301.18
  Top Layer region: 992.13,935.04 1031.5,935.04 1031.5,1064.96 992.13,1064.96
  Top Layer region: 992.13,698.82 1031.5,698.82 1031.5,828.74 992.13,828.74
  Top Layer region: 992.13,462.6 1031.5,462.6 1031.5,592.52 992.13,592.52
  Top Layer region: 992.13,226.38 1031.5,226.38 1031.5,356.3 992.13,356.3
  Top Layer region: 911.42,0 911.42,39.37 992.13,39.37 992.13,120.08 1031.5,120.08 1031.5,0
  Top Layer region: 698.82,0 698.82,39.37 805.12,39.37 805.12,0
  Top Layer region: 462.6,0 462.6,39.37 592.52,39.37 592.52,0
  Top Layer region: 226.38,0 226.38,39.37 356.3,39.37 356.3,0
  body extent 0,0 1031,1531, height 236
BMI-S-230-F [mil] "Laird BMI-S-230-F EMI Shield"
  round 30 smd: 1(19.68,1240.16) 1(19.68,1003.94) 1(19.68,767.72) 1(19.68,531.5) 1(19.68,295.28) 1(20,25) 1(25,1511.5) 1(305.12,19.69) 1(309.06,1511.81) 1(541.34,19.69) 1(545.28,1511.81) 1(777.56,19.69) 1(781.5,1511.81) 1(1013.78,19.69) 1(1017.72,1511.81) 1(1250,19.69) 1(1253.94,1511.81) 1(1486.22,19.69) 1(1490.16,1511.81) 1(1722.44,19.69) 1(1726.38,1511.81) 1(2006.5,20) 1(2011.5,1506.5) 1(2011.81,763.78) 1(2011.81,1000) 1(2011.81,1236.22) 1(2011.81,291.34) 1(2011.81,527.56)
  Top Layer region: 0,0 0,131.89 39.37,131.89 39.37,39.37 145.67,39.37 145.67,0
  Top Layer region: 0,218.5 0,368.11 39.37,368.11 39.37,218.5
  Top Layer region: 0,454.72 0,604.33 39.37,604.33 39.37,454.72
  Top Layer region: 0,690.95 0,840.55 39.37,840.55 39.37,690.95
  Top Layer region: 0,927.17 0,1076.77 39.37,1076.77 39.37,927.17
  Top Layer region: 0,1163.39 0,1312.99 39.37,1312.99 39.37,1163.39
  Top Layer region: 0,1399.61 0,1531.5 145.67,1531.5 145.67,1492.13 39.37,1492.13 39.37,1399.61
  Top Layer region: 232.28,1492.13 381.89,1492.13 381.89,1531.5 232.28,1531.5
  Top Layer region: 468.5,1492.13 618.11,1492.13 618.11,1531.5 468.5,1531.5
  Top Layer region: 704.72,1492.13 704.72,1531.5 854.33,1531.5 854.33,1492.13
  Top Layer region: 940.95,1492.13 1090.55,1492.13 1090.55,1531.5 940.95,1531.5
  Top Layer region: 1177.17,1492.13 1326.77,1492.13 1326.77,1531.5 1177.17,1531.5
  Top Layer region: 1413.39,1492.13 1562.99,1492.13 1562.99,1531.5 1413.39,1531.5
  Top Layer region: 1649.61,1492.13 1799.21,1492.13 1799.21,1531.5 1649.61,1531.5
  Top Layer region: 1885.83,1492.13 1885.83,1531.5 2031.5,1531.5 2031.5,1399.61 1992.13,1399.61 1992.13,1492.13
  Top Layer region: 1992.13,1163.39 2031.5,1163.39 2031.5,1312.99 1992.13,1312.99
  Top Layer region: 1992.13,927.17 2031.5,927.17 2031.5,1076.77 1992.13,1076.77
  Top Layer region: 1992.13,690.95 2031.5,690.95 2031.5,840.55 1992.13,840.55
  Top Layer region: 1992.13,454.72 2031.5,454.72 2031.5,604.33 1992.13,604.33
  Top Layer region: 1992.13,218.5 2031.5,218.5 2031.5,368.11 1992.13,368.11
  Top Layer region: 1885.83,0 2031.5,0 2031.5,131.89 1992.13,131.89 1992.13,39.37 1885.83,39.37
  Top Layer region: 1649.61,0 1799.21,0 1799.21,39.37 1649.61,39.37
  Top Layer region: 1413.39,0 1413.39,39.37 1562.99,39.37 1562.99,0
  Top Layer region: 1177.17,0 1326.77,0 1326.77,39.37 1177.17,39.37
  Top Layer region: 940.95,0 940.95,39.37 1090.55,39.37 1090.55,0
  Top Layer region: 704.72,0 854.33,0 854.33,39.37 704.72,39.37
  Top Layer region: 468.5,0 468.5,39.37 618.11,39.37 618.11,0
  Top Layer region: 232.28,0 381.89,0 381.89,39.37 232.28,39.37
  Top Layer region: 0,218.5 39.37,218.5 39.37,348.43 0,348.43
  body extent 0,0 2031,1531, height 236
CD542 [mm] "Mini-Circuits CD542 Package"
  rect 1.65x2.54 smd paste-0.1: 1(-2.54,-2.54) 2(0,-2.54) 3(2.54,-2.54) 4(2.54,2.54) 5(0,2.54) 6(-2.54,2.54)
  silkscreen extent -5.33,-3.05 4.32,3.05, body extent -3.94,-2.79 3.94,2.79, height 3
CK605 [mil] "Mini-Circuits CK605 Package"
  rect 60x60 smd: 1(0,0) 2(100,0) 3(200,0) 4(300,0) 5(405,105) 6(405,205) 7(405,305) 8(405,405) 9(300,510) 10(200,510) 11(100,510) 12(0,510) 13(-105,405) 14(-105,305) 15(-105,205) 16(-105,105)
  silkscreen extent -150,-50 425,525, body extent -105,0 405,510, height 180
FV1206 [mil] "Mini-Circuits LTCC SMT Chip-Filter"
  rect 41x77 smd: 1(-64,0) 3(64,0)
  rect 24x49 smd: 2(0,-36.5) 4(0,36.5)
  silkscreen extent -75,-55 75,55
HDR1X2 [mm] "Connector; Header; 2 Position"
  rect 1.5x1.5 hole 0.9: 1(0,0)
  round 1.5 hole 0.9: 2(2.54,0)
  silkscreen extent -1.27,-1.27 3.81,1.27, body extent -1.27,-1.27 3.81,1.27, height 6.35
HDR1X3 [mm] "Connector; Header; 3 Position"
  rect 1.5x1.5 hole 0.9: 1(0,0)
  round 1.5 hole 0.9: 2(2.54,0) 3(5.08,0)
  silkscreen extent -1.27,-1.27 6.35,1.27
"MEM2012S LC Filter" [mm] "MEM2012S TDK LC Filter"
  rect 0.5x0.5 smd: 1(-1.1,0) 3(1.1,0)
  rect 0.4x2 smd: 2(0,0)
  Top Layer region: -1.5,-0.5 -1.5,0.5 -0.8,0.5 -0.7,0 -0.8,-0.5
  Top Layer region: 1.5,0.5 1.5,-0.5 0.8,-0.5 0.7,0 0.8,0.5
  silkscreen extent -1.4,-0.9 1.4,0.9, body extent -1.4,-0.7 1.4,0.7, height 0.85
"MHDR2X5 - Shrouded" [mm] "Connector; Header; 5x2 Position"
  rect 1x1 hole 0.6: 1(-5.08,0)
  round 1 hole 0.6: 2(-5.08,1.27) 3(-3.81,0) 4(-3.81,1.27) 5(-2.54,0) 6(-2.54,1.27) 7(-1.27,0) 8(-1.27,1.27) 9(0,0) 10(0,1.27)
  silkscreen extent -9.08,-2.5 4,3.27, body extent -9.08,-2 4,3.27, height 5.4
"Molex Mini-Fit Jr 5569 - 2 Pin, RA" [mil] "Molex Mini-Fit Jr 5569 - 2 Pin Right Angle ( 39-30-1021 )( WM1363-ND )"
  round 140 hole 118: 0(0,0)
  rect 120x120 hole 71: 1(0,287)
  round 120 hole 71: 2(0,504)
  silkscreen extent -105,-130 105,254, body extent -104,-260 124,525, height 449
QFN50P400X400X90_HS-21N#1 [mm] "QFN, 20-Leads, Body 4.00x4.00mm, Pitch 0.50mm, Thermal Pad 2.06x2.06mm, IPC Medium Density"
  rect 0.81x0.25 smd: 1(-1.845,1) 2(-1.845,0.5) 3(-1.845,0) 4(-1.845,-0.5) 5(-1.845,-1) 11(1.845,-1) 12(1.845,-0.5) 13(1.845,0) 14(1.845,0.5) 15(1.845,1)
  rect 0.25x0.81 smd: 6(-1,-1.845) 7(-0.5,-1.845) 8(0,-1.845) 9(0.5,-1.845) 10(1,-1.845) 16(1,1.845) 17(0.5,1.845) 18(0,1.845) 19(-0.5,1.845) 20(-1,1.845)
  rect 2.06x2.06 smd: 21(0,0)
  silkscreen extent -2.93,-2.15 2.15,2.15, body extent -2,-2 2,2, height 0.9
QFN50P400X400X90_HS-21N#2 [mm] "QFN, 20-Leads, Body 4.00x4.00mm, Pitch 0.50mm, Thermal Pad 2.06x2.06mm, IPC Medium Density"
  rect 0.635x0.635 on Keep-Out paste-0.1: 0(-1.676,1.676)
  rect 0.81x0.25 smd: 1(-1.845,1) 2(-1.845,0.5) 3(-1.845,0) 4(-1.845,-0.5) 5(-1.845,-1) 11(1.845,-1) 12(1.845,-0.5) 13(1.845,0) 14(1.845,0.5) 15(1.845,1)
  rect 0.25x0.81 smd: 6(-1,-1.845) 7(-0.5,-1.845) 8(0,-1.845) 9(0.5,-1.845) 10(1,-1.845) 16(1,1.845) 17(0.5,1.845) 18(0,1.845) 19(-0.5,1.845) 20(-1,1.845)
  rect 2.06x2.06 smd: 21(0,0)
  silkscreen extent -2.93,-2.15 2.15,2.15, body extent -2,-2 2,2, height 0.9
SI57x [mm] "Silicon Labs Programmable Oscillator"
  rect 1.7x2.15 smd: 1(-2.54,-2.1) 2(0,-2.1) 3(2.54,-2.1) 4(2.54,2.1) 5(0,2.1) 6(-2.54,2.1)
  rect 1.545x1.3 smd: 7(-2.852,0) 8(2.852,0)
  silkscreen extent -5.34,-3.8 4.2,3.8, body extent -4.2,-3.8 4.2,3.8, height 1.8
"SMA Jack - PCB Edge - MultiSize" [mil] "SMA Jack - PCB Edge - MultiSize"
  rect 190x90 smd: 1(100,0)
  round 30 hole 15: 2(50,175) 2(50,125) 2(50,-125) 2(50,-175) 2(100,175) 2(100,125) 2(100,-125) 2(100,-175) 2(150,125) 2(150,175) 2(150,-175) 2(150,-125)
  rect 190x155 smd: 2(100,150) 2(100,-150)
  rect 190x155 smd far side: 2(100,150) 2(100,-150)
  silkscreen extent 0,-240 210,240, body extent -5,-245 215,245, height 180
"SMT 16-pin rectangular header" [mil]
  rect 39x164 smd: 1(-350,-141) 2(-350,141) 3(-250,-141) 4(-250,141) 5(-150,-141) 6(-150,141) 7(-50,-141) 8(-50,141) 9(50,-141) 10(50,141) 11(150,-141) 12(150,141) 13(250,-141) 14(250,141) 15(350,-141) 16(350,141)
  silkscreen extent -550,-250 550,173, body extent -550,-173 550,173, height 358
SOD123/X.85 [mm] "SOD-123; 2 Leads; Body 2.7 x 1.6 mm, (LxW)"
  rect 1.6x0.85 smd: 1(-1.7,0) 2(1.7,0)
  silkscreen extent -1.45,-0.9 1.45,0.9
SOIC127P600-8CN [mm] "SOIC, 8-Leads, Body 4.9x3.9mm, Pitch 1.27mm, IPC Medium Density"
  oval 1.5x0.6 smd: 1(-2.75,1.905) 2(-2.75,0.635) 3(-2.75,-0.635) 4(-2.75,-1.905) 5(2.75,-1.905) 6(2.75,-0.635) 7(2.75,0.635) 8(2.75,1.905)
  silkscreen extent -2.87,-2.5 1.6,2.88, body extent -3.01,-2.5 3.01,2.5, height 1.75
SOP635P600-16AN [mm] "SOP, 16-Leads, Body 4.9x3.9mm, Pitch 0.635mm, IPC Medium Density"
  oval 1.95x0.4 smd: 1(-2.525,2.222) 2(-2.525,1.587) 3(-2.525,0.952) 4(-2.525,0.317) 5(-2.525,-0.318) 6(-2.525,-0.953) 7(-2.525,-1.588) 8(-2.525,-2.223) 9(2.525,-2.222) 10(2.525,-1.587) 11(2.525,-0.952) 12(2.525,-0.317) 13(2.525,0.318) 14(2.525,0.953) 15(2.525,1.588) 16(2.525,2.223)
  silkscreen extent -2.65,-2.5 1.2,3.1, body extent -1.99,-2.5 1.99,2.5, height 1.76
SOT23-3N [mm] "SOT23, 3-Leads, Body 2.9x1.3mm, Pitch 0.95mm, Lead Span 2.5mm, IPC Medium Density"
  rect 1.5x0.6 smd: 1(-0.95,0.95) 2(-0.95,-0.95) 3(0.95,0)
  silkscreen extent -1.07,-1.5 0.7,1.92, body extent -0.7,-1.5 0.7,1.5, height 1.1
TL3302BF180QG/TR [mm] "SMT Push-Button NO Tactile Switch"
  rect 3.35x2.16 smd: 1(-4.925,0) 2(4.925,0)
  silkscreen extent -3,-1.75 3,1.75, body extent -3,-1.75 3,1.75, height 5
TO228P1000-3_4N [mm] "D-PAK, 4-Leads, Body 6.2x6.5mm, Pitch 2.28mm, Lead Span 9.9mm, IPC Medium Density"
  rect 1.9x0.95 smd: 1(-4.5,2.28) 3(-4.5,-2.28)
  rect 7.4x5.5 smd: 4(1.75,0)
  silkscreen extent -4.62,-3.35 -2.35,3.43, body extent -2.25,-3.37 4.1,3.37, height 2.39
TO254P1520-3_4N [mm] "D2-PAK, 4-Leads, Body 9x10.2mm, Pitch 2.54mm, Lead Span 15.2mm, IPC Medium Density"
  rect 3.8x1.05 smd: 1(-6.3,2.54) 3(-6.3,-2.54)
  rect 8.4x10.7 smd: 4(4,0)
  silkscreen extent -6.42,-5.35 -0.6,5.35, body extent -3.3,-5.33 6.35,5.33, height 4.83
"TO-220 - Small Heatsink" [mil] "TO-220 - Small Heatsink"
  round 160 hole 80: 0(-250,180) 0(250,180)
  rect 80x80 hole 40: 1(-100,0)
  round 80 hole 40: 2(0,0) 3(100,0)
  silkscreen extent -207,-99 207,86, body extent -360,-190 360,440, height 1221
TSOP65P490-8AN [mm] "TSOP, 8-Leads, Body 3x3mm, Pitch 0.65mm, IPC Medium Density"
  oval 1.7x0.45 smd: 1(-2.1,0.975) 2(-2.1,0.325) 3(-2.1,-0.325) 4(-2.1,-0.975) 5(2.1,-0.975) 6(2.1,-0.325) 7(2.1,0.325) 8(2.1,0.975)
  silkscreen extent -2.22,-1.55 0.85,1.87, body extent -2.5,-1.6 2.5,1.6, height 1.1
TSQFP50P900X900-48N [mm] "Thin QFP, 48-Leads, Body 7x7mm, Pitch 0.5mm, IPC Medium Density"
  oval 1.8x0.3 smd: 1(-4.05,2.75) 2(-4.05,2.25) 3(-4.05,1.75) 4(-4.05,1.25) 5(-4.05,0.75) 6(-4.05,0.25) 7(-4.05,-0.25) 8(-4.05,-0.75) 9(-4.05,-1.25) 10(-4.05,-1.75) 11(-4.05,-2.25) 12(-4.05,-2.75) 25(4.05,-2.75) 26(4.05,-2.25) 27(4.05,-1.75) 28(4.05,-1.25) 29(4.05,-0.75) 30(4.05,-0.25) 31(4.05,0.25) 32(4.05,0.75) 33(4.05,1.25) 34(4.05,1.75) 35(4.05,2.25) 36(4.05,2.75)
  oval 0.3x1.8 smd: 13(-2.75,-4.05) 14(-2.25,-4.05) 15(-1.75,-4.05) 16(-1.25,-4.05) 17(-0.75,-4.05) 18(-0.25,-4.05) 19(0.25,-4.05) 20(0.75,-4.05) 21(1.25,-4.05) 22(1.75,-4.05) 23(2.25,-4.05) 24(2.75,-4.05) 37(2.75,4.05) 38(2.25,4.05) 39(1.75,4.05) 40(1.25,4.05) 41(0.75,4.05) 42(0.25,4.05) 43(-0.25,4.05) 44(-0.75,4.05) 45(-1.25,4.05) 46(-1.75,4.05) 47(-2.25,4.05) 48(-2.75,4.05)
  silkscreen extent -4.17,-2.75 2.75,3.57, body extent -3.5,-3.5 3.5,3.5, height 1.6
TSSOP50P490-10AN [mm] "TSSOP, 10-Leads, Body 3x3mm, Pitch 0.5mm, IPC Medium Density"
  oval 1.7x0.3 smd: 1(-2.05,1) 2(-2.05,0.5) 3(-2.05,0) 4(-2.05,-0.5) 5(-2.05,-1) 6(2.05,-1) 7(2.05,-0.5) 8(2.05,0) 9(2.05,0.5) 10(2.05,1)
  silkscreen extent -2.17,-1.6 0.8,1.82, body extent -1.6,-1.6 1.6,1.6, height 1.1
TTT881 [mil] "Mini-Circuits TTT881 Package"
  round 20 smd: 1(235,-170) 2(-240,-170) 3(0,-345) 4(0,0) 5(-175,-345) 6(175,-345)
  Top Layer region: -30,-35 -30,35 30,35 30,-35
  Top Layer region: -270,-203 -270,-143 -200,-143 -200,-203
  Top Layer region: -205,-380 -205,-310 -145,-310 -145,-380
  Top Layer region: -30,-380 -30,-310 30,-310 30,-380
  Top Layer region: 145,-380 145,-310 205,-310 205,-380
  Top Layer region: 200,-203 200,-143 270,-143 270,-203
  silkscreen extent -265,-375 265,30, body extent -265,-375 265,30, height 230
"USB Connector (type B)" [mm] "USB-B right angle through hole connector (molex)"
  rect 1.8x1.8 hole 0.92: 1(1.25,1)
  round 1.8 hole 0.92: 2(-1.25,1) 3(-1.25,-1) 4(1.25,-1)
  round 5 hole 2.3: 5(-6.02,-3.71) 6(6.02,-3.71)
  silkscreen extent -6,-15 6,2.2, body extent -8.64,-15 8.64,2.2, height 11
V [mm] "Capacitor, SM Tantalum; Body 7.3 x 4.3 mm (LxW typ)"
  rect 2.6x2.4 smd: 1(-3.2,0) 2(3.2,0)
  silkscreen extent -4.57,-2.3 3.8,2.43, body extent -3.78,-2.16 3.52,2.14, height 4.15
? [mil]
  silkscreen extent 48,168 2376,2928, body extent 895,1385 1010,1670

## Part data
C1 C2 C4 C5 C54_ATTEN3 C54_ATTEN4 C56_ATTEN3 C56_ATTEN4: library part "Cap - SMT Small"
C6 C7 C8 C9 C10 C11 C14 C15 C16 C18 C19 C20 C21 C22 CU1 CU2 CU3 CX1 CX2: "Capacitor (Semiconductor SIM Model)"
C28 C29 C30 C31 C32 C33: "Capacitor"
CAN1: library part "BMI-S-205-F RF/EMI Can", "Laird Technologies 2-part EMI can"
CAN2 CAN3: library part "BMI-S-230-F-R RF/EMI Can", "Laird Technologies 2-part EMI can"
CB6 CB7 CB8: "KEMET T520 KO-CAP  Polymer SMT Tantalum"
CBP2: library part "100 uf SMT Panasonic Cap"
CR3 CR4: "PulseGuard® Lead-Free 0603 Surface Mount Polymeric ESD Suppressors"
D1 D2 D5 D6 D7 D17 DRX DTX LED8: "T 1 3/4 LED"
D8 D18: "Zener Diode"
EORE_CONN: "Header, 8-Pin, Dual row"
ERASE HEATER Pow1 POWER TPI2C: "Header, 2-Pin"
GND J1 J2 J3: library part "Jumper - 2 Pin", "Jumper - 2-Pin"
IIC: "Header, 4-Pin"
J5: library part "Jumper - SMT Resistor"
J6: library part "Jumper - 3 Pin", "Jumper - 3-Pin"
JTAG: library part "ARM JTAG-10", "ARM 10-Pin JTAG Interface"
LC1 LC2 LC3 LC4 LC5 LC6 LC7 LC8 LC9 LC10 LC12 LC13: library part "MEM2012F - Signal Filter", "Signal Line 3-terminal Filters"
M1: "Wideband Frequency Mixer Level 13 (LO Power +13 dBm) 600 to 2700 MHz"
OF1: library part "LFCN-xxx Filter", "Ceramic Low Pass Filter"
P2 P3: "RF Coaxial PCB Connector, MMCX; Thru-Hole, Vertical Mount Plug,  50 Ohm Impedance"
Q2 Q3: "N-Channel MOSFET"
Q4 Q5: library part MOSFET-P, "P-Channel MOSFET"
R1 R2 R3 R4 R6 R8 R16 R17 R18 R19 R20 R21 R22 R23 R24 R41 R42 R43 R44 R45 R46 R47 R48 R49 R51_ATTEN3 R51_ATTEN4 R52_ATTEN3 R52_ATTEN4 R53_ATTEN3 R53_ATTEN4 R54_ATTEN3 R54_ATTEN4 R55_ATTEN3 R55_ATTEN4 R56_ATTEN3 R56_ATTEN4 R57_ATTEN3 R57_ATTEN4 RC3 RC4 RD8 RD9 RD10 RD19 RG1 RG2 RL1 RL2 RLED8 RP1 RP2 RU3 RU4 RU5 RU6: "Semiconductor Resistor"
RESET: "Switch"
T1: "Surface Mount RF Transformer"
TPSPI: "Header, 3-Pin"
U1: "SAM4N ARM Cortex-M4 Microcontrollers"
U2: library part SI570, "10 MHZ TO 1.4 GHZ I2C PROGRAMMABLE XO/VCXO"
U4: "USB To Basic Serial Bridge IC"
U7: "Dual bidirectional I2C-bus and SMBus voltage-level translator"
U8: "Dual, 12-/14-/16-Bit nanoDACs® with  5 ppm/°C On-Chip Reference, I2C Interface"
U9: "Dual Rail-to-Rail Input/Output, 30V, Wide Voltage Range, High Output Operational Amplifier"
U51_ATTEN3 U51_ATTEN4: "31.5 dB, 0.5 dB Step 6 Bit, Serial Control Interface, Single Positive Supply Voltage"
USBMCU: library part "USB B connector - Through hole"
VR1 VR3: library part MIC2940, "1.2A Low-Dropout Voltage Regulator"
VR2: "Very low drop 500 ma voltage regulators"
X1: library part "SMT Crystal", "16 MHz Micro SMT Crystal"
X2 X3: library part "ROS-2650 VCO", "Linear Tuning 2165 to 2650 MHz SMT Voltage Controlled Oscillator"

## Free pads (board coordinates)
  round 40 smd paste-3.94: 0(2975.51,2120.16)
  round 250 hole 130: 6(5800,4500) 8(1200,700) 8(1200,4500) 9(5800,700)

## Via types
v1: diameter 40, hole 20, Top Layer to Gnd 2, tented both sides, 278 vias
v2: diameter 25, hole 15, Top Layer to Gnd 2, tented both sides, 147 vias
v3: diameter 30, hole 15, Top Layer to Gnd 2, tented both sides, 58 vias
v4: diameter 45, hole 25, Top Layer to Gnd 2, tented both sides, 31 vias
v5: diameter 25, hole 15, Top Layer to Gnd 2, 18 vias
v6: diameter 50, hole 30, Top Layer to Gnd 2, tented both sides, 1 vias

## Nets (pads, with @x,y where several pads share a name; then routed paths per layer and width w, separated by ;. In a path a pad name is that pad's centre, name@x,y a point inside that pad or via, vN(x,y) a via of type N, cw(c..) or ccw(c..) an arc to the next point about the centre after c; other vN are vias at no path point)
3V3: C4.2 C5.2 C6.2 C7.2 C15.2 C16.2 C54_ATTEN3.2 C54_ATTEN4.2 C56_ATTEN3.2 C56_ATTEN4.2 CBP2.1 EORE_CONN.5 EORE_CONN.6 ERASE.1 JTAG.1 LED8.1 R2.2 R3.2 R4.2 R6.2 R44.2 RP1.2 RP2.2 U1.1 U1.7 U1.13 U1.33 U1.47 U2.6 U7.2 U51_ATTEN3.6 U51_ATTEN3.9 U51_ATTEN3.13 U51_ATTEN4.6 U51_ATTEN4.9 U51_ATTEN4.13 VR2.3 | length 2956.2
  Top Layer w6: ERASE.1@2550,2335 ERASE.1@2550.07,2334.93
  Top Layer w7: R6.2@1580,2562.44 v2(1627.44,2562.44) ; R4.2@1580,2737.56 v2(1627.44,2737.56) ; R2.2@1580,2842.44 v2(1627.44,2842.44) ; R3.2@1580,3017.56 v2(1627.44,3017.56) ; v2(1742.56,847.56) LED8.1@1800,847.56 ; 5471.57,1262.42 C54_ATTEN3.2@5471.57,1285.44
  Top Layer w8: C6.2@2730,1897.56 2730,2025 2746.42,2041.42 U1.47@2790.55,2041.42 2833.13,2041.42 v3(2876.72,2085) ; v3(2801.51,1981.51) 2812.46,1970.55 U1.1@2841.73,1970.55 ; C7.2@2950,1817.56 2959.84,1827.4 U1.7@2959.84,1970.55 2959.84,2035.3 v3(2950,2045.15) ; v3(3022.07,2065) 3065.34,2021.73 U1.13@3109.45,2021.73 ccw(c3166.48,2021.73) 3126.14,1981.42 C16.2@3140,1967.56 ; U51_ATTEN4.6@5160.63,2807.36 5160.63,2789.23 ccw(c5227.58,2789.23) 5180.22,2741.91 ; 5180.24,2741.89 5197.46,2724.67 C54_ATTEN4.2@5206.51,2733.72 ; v2@5197.44,2678.54 C54_ATTEN4.2@5197.44,2725 ; C54_ATTEN4.2@5206.53,2733.74 ccw(c5174.69,2765.53) 5219.69,2765.53 U51_ATTEN4.9@5219.69,2807.36 ; v2@5220,1285.44 C56_ATTEN3.2@5266.46,1285.44 ; U51_ATTEN3.6@5229.63,1368.13 5229.63,1350 ccw(c5296.58,1350) 5249.22,1302.68 ; 5249.24,1302.66 C56_ATTEN3.2@5266.46,1285.44 ; U51_ATTEN4.13@5272.64,2880 5279.45,2880 cw(c5279.45,2843.22) 5305.43,2869.25 5375.8,2798.89 cw(c5311.12,2734.23) C56_ATTEN4.2@5402.57,2734.23 ; C56_ATTEN3.2@5275.51,1294.49 C56_ATTEN3.2@5266.46,1285.44 ; C56_ATTEN3.2@5275.53,1294.51 ccw(c5243.7,1326.3) 5288.69,1326.3 U51_ATTEN3.9@5288.69,1368.13 ; U51_ATTEN3.13@5341.64,1440.77 5348.45,1440.77 cw(c5348.45,1404) 5374.43,1430.03 ; 5374.46,1430 5444.8,1359.66 cw(c5380.12,1295) 5471.57,1295 C54_ATTEN3.2@5471.57,1285.44 v2@5471.57,1238.98 ; v2@5402.56,2678.54 C56_ATTEN4.2@5402.56,2725
  Top Layer w10: U7.2@2157.32,3072.8 v2(2214.76,3072.8) ; v3(2885,2435) 2887.2,2432.8 cw(c2854.4,2400) 2900.79,2400 U1.33@2900.79,2289.45 2900.79,2244.21 2911.11,2233.89 v3(2911.11,2187.18) ; v3@3652.44,1987.99 RP1.2@3652.44,2040 ; RP2.2@3847.56,2040 v3@3847.56,2092.01
  Top Layer w15: v4(3369.76,3824.33) 3369.76,3897.83 3399.76,3927.83 3429.76,3897.83 v4(3429.76,3824.33)
  Top Layer w20: R44.2@1573.15,3230 v6(1640.59,3230)
  Top Layer w30: VR2.3@3399.53,3945.67 cw(c3407.64,3945.67) 3407.64,3953.78 CBP2.1@3634.76,3953.78
  other v2: 2630,573 2630,703 2630,855 2630,985 5472.02,1243.98 5225,1285 5197.88,2683.54 5403,2683.54
  other v3: 3651.34,1987.99 3848.66,2092.01
  other v4: 4535,1785 4535,1835
5V0: C19.2 CB6.1 J6.3 R16.2 R17.2 R18.2 U8.5 U8.9 VR2.1 VR3.3 | length 3775.3
  Top Layer w6: C19.2@2572.44,2900 2572.44,3006.81 cw(c2625,3006.81) 2625,3059.37 U8.5@2660.71,3059.37
  Top Layer w7: R16.2@2407.56,3220 v2(2455,3220) ; v2(2410,2905) R17.2@2410,2952.44 ; R18.2@2410,3117.56 v2(2410,3165)
  Top Layer w10: U8.9@2499.29,3000.31 2529.69,3000.31 cw(c2529.69,2980) 2550,2980 2550,2943.65 ccw(c2601.21,2943.65) 2564.99,2907.45 C19.2@2572.44,2900 v2(2525,2900) ; v1(2600,3530) 2600,3712.89 cw(c3100,3712.89) 2746.45,4066.45 VR3.3@2840,4160
  Top Layer w20: CB6.1@2820,3945.98 2840,3945.98 VR3.3@2840,4160
  Top Layer w35: VR2.1@3220.24,3942.83 cw(c3220.24,4131.31) 3086.96,3998.04 2985.1,4099.9 ccw(c2840,3954.79) VR3.3@2840,4160 3351.72,3648.28 ccw(c3420,3716.57) J6.3@3420,3620
  Power w7: v2(2410,2905) ccw(c2415,2905) 2415,2900 v2(2525,2900) ; v2(2410,3165) 2410,3175 cw(c2455,3175) v2(2455,3220) 2600,3220
  Power w10: v2(2525,2900) ccw(c2525,2975) 2600,2975 2600,3220 v1(2600,3530)
12V+: CB7.1 J6.1 VR1.3 VR3.1 | length 2601.9
  Top Layer w20: VR1.3@2060,4160 2060,3965.98 ccw(c2080,3965.98) CB7.1@2080,3945.98 ; 2264.88,3838.52 cw(c1819.56,3761.25) 2271.53,3761.25
  Top Layer w35: 2139.15,4080.85 VR1.3@2060,4160 VR3.1@2640,4160 ; 2139.2,4080.8 cw(c1819.56,3761.25) 2264.88,3838.52 ; 2271.53,3761.25 ccw(c2567.79,3761.25) 2567.79,3465 3311.36,3465 cw(c3311.36,3311.36) J6.1@3420,3420
CLOCK: LC2.3 TPSPI.2 U1.16 U51_ATTEN3.4 U51_ATTEN4.4 | length 5832
  Top Layer w6: v2(3205,1560) ccw(c3410.21,1765.21) 3410.21,1475 3440,1475 cw(c3440,1173.22) 3560.57,1449.87 cw(c3440,1173.22) 3653.39,1386.61 TPSPI.2@3680,1360 v2(3930,1360) 3930,1335 ccw(c4060,1335) 4060,1205 4143.79,1205 cw(c4143.79,1153.79) 4180,1190 ccw(c4228.28,1238.28) 4228.28,1170 5075,1170 ccw(c5075,1259.02) 5164.02,1259.02 5164.02,1405 cw(c5180.1,1405) 5165.66,1412.09 cw(c5180.1,1405) 5173.02,1419.44 cw(c5180.1,1405) 5180.1,1421.09 U51_ATTEN3.4@5196.36,1421.09 ; v2(3930,1750) 3930,2035 cw(c4055,2035) 4055,2160 5105,2160 ccw(c5105,2225) 5170,2225 5170,2451.36 ccw(c5016.36,2451.36) 5125,2560 cw(c5197.39,2632.39) 5095.02,2632.39 5095.02,2844.23 cw(c5111.1,2844.23) 5096.66,2851.31 cw(c5111.1,2844.23) 5104.02,2858.67 cw(c5111.1,2844.23) 5111.1,2860.32 U51_ATTEN4.4@5127.36,2860.32
  Top Layer w8: LC2.3@3030,1533.31 v2(3130.85,1634.15) ; U1.16@3109.45,2080.79 3139.21,2080.79 cw(c3139.21,2035) 3178.09,2059.19 cw(c3139.21,2035) 3185,2035 3185,1764.89 cw(c3000.11,1764.89) v2@3130.88,1634.19
  Power w6: v2(3130.85,1634.15) v2(3205,1560) ; v2(3930,1360) v2(3930,1750)
CS_1: LC4.1 U1.4 | length 855.5
  Top Layer w8: LC4.1@2310,1533.31 cw(c2615.86,1227.44) 2615.86,1660 2730,1660 ccw(c2730,1790) 2780,1670 ccw(c2730,1790) 2850,1740 ccw(c2730,1790) 2860,1790 2860,1865 2900.79,1905.79 U1.4@2900.79,1970.55
CS_2: LC5.3 U1.5 | length 789.4
  Top Layer w8: LC5.3@2410,1533.31 cw(c2655.51,1287.8) 2655.51,1635 2740,1635 ccw(c2740,1775) 2787.59,1643.34 ccw(c2740,1775) 2871.66,1727.41 ccw(c2740,1775) 2880,1775 2880,1855 2920.47,1895.47 U1.5@2920.47,1970.55
CS_3: LC3.1 U1.6 | length 690.3
  Top Layer w8: LC3.1@2550,1533.31 2558.64,1541.95 cw(c2735,1365.59) 2735,1615 2770,1615 ccw(c2770,1750) 2905,1750 2905,1850 2940.16,1885.16 U1.6@2940.16,1970.55
CS_4: LC6.3 U1.9 | length 745.9
  Top Layer w8: LC6.3@2650,1533.31 cw(c2798.94,1384.37) 2798.94,1595 2905,1595 ccw(c2905,1735) 3039.13,1694.87 ccw(c2905,1735) 3045,1735 3045,1850 2999.21,1895.79 U1.9@2999.21,1970.55
CS_5: LC7.1 U1.10 | length 640.1
  Top Layer w8: LC7.1@2790,1533.31 cw(c2878.58,1444.72) 2878.58,1570 2915,1570 ccw(c2915,1720) 3065,1720 3065,1860 3018.9,1906.1 U1.10@3018.9,1970.55
CS_6: LC1.3 U1.11 | length 576.7
  Top Layer w8: LC1.3@2890,1533.31 2898.13,1533.31 ccw(c2898.13,1726.87) 3035,1590 ccw(c2902.22,1722.78) 3090,1722.78 3090,1870 3038.58,1921.42 U1.11@3038.58,1970.55
CS_7: U1.21 U51_ATTEN3.5 | length 2943.7
  Top Layer w6: U1.21@3109.45,2179.21 3260.79,2179.21 cw(c3260.79,2090) 3350,2090 3350,1825 ccw(c3450,1825) 3450,1725 3465,1725 cw(c3465,1675) 3515,1675 3515,1590 ccw(c3570,1590) 3570,1535 3664.64,1535 cw(c3664.64,1449.64) 3725,1510 ccw(c3881.92,1666.92) 3881.92,1445 4090,1445 cw(c4090,1420) 4115,1420 ccw(c4315,1420) 4315,1220 v2(5061.36,1220) ; v2@5196.36,1215 U51_ATTEN3.5@5196.36,1401.4
  Power w6: v2(5061.36,1220) v2(5196.36,1220)
CS_8: U1.26 U51_ATTEN4.5 | length 2916.7
  Top Layer w6: U1.26@3038.58,2289.45 3038.58,2338.58 cw(c3075,2338.58) 3047.82,2362.82 cw(c3075,2338.58) 3050.77,2365.77 cw(c3075,2338.58) 3075,2375 ccw(c3075,2459.5) 3134.75,2399.75 3140,2405 cw(c3200.36,2344.64) 3176.64,2426.64 cw(c3200.36,2344.64) 3200.36,2430 3475,2430 cw(c3475,2390) 3515,2390 3515,2260 ccw(c3565,2260) 3565,2210 4870,2210 ccw(c4870,2260) 4920,2260 4920,2484.53 cw(c5167.06,2484.53) v2(4992.36,2659.23) ; v2@5127.36,2654.23 U51_ATTEN4.5@5127.36,2840.63
  Power w6: v2(4992.36,2659.23) v2(5127.36,2659.23)